# Allegro board vibration.brd
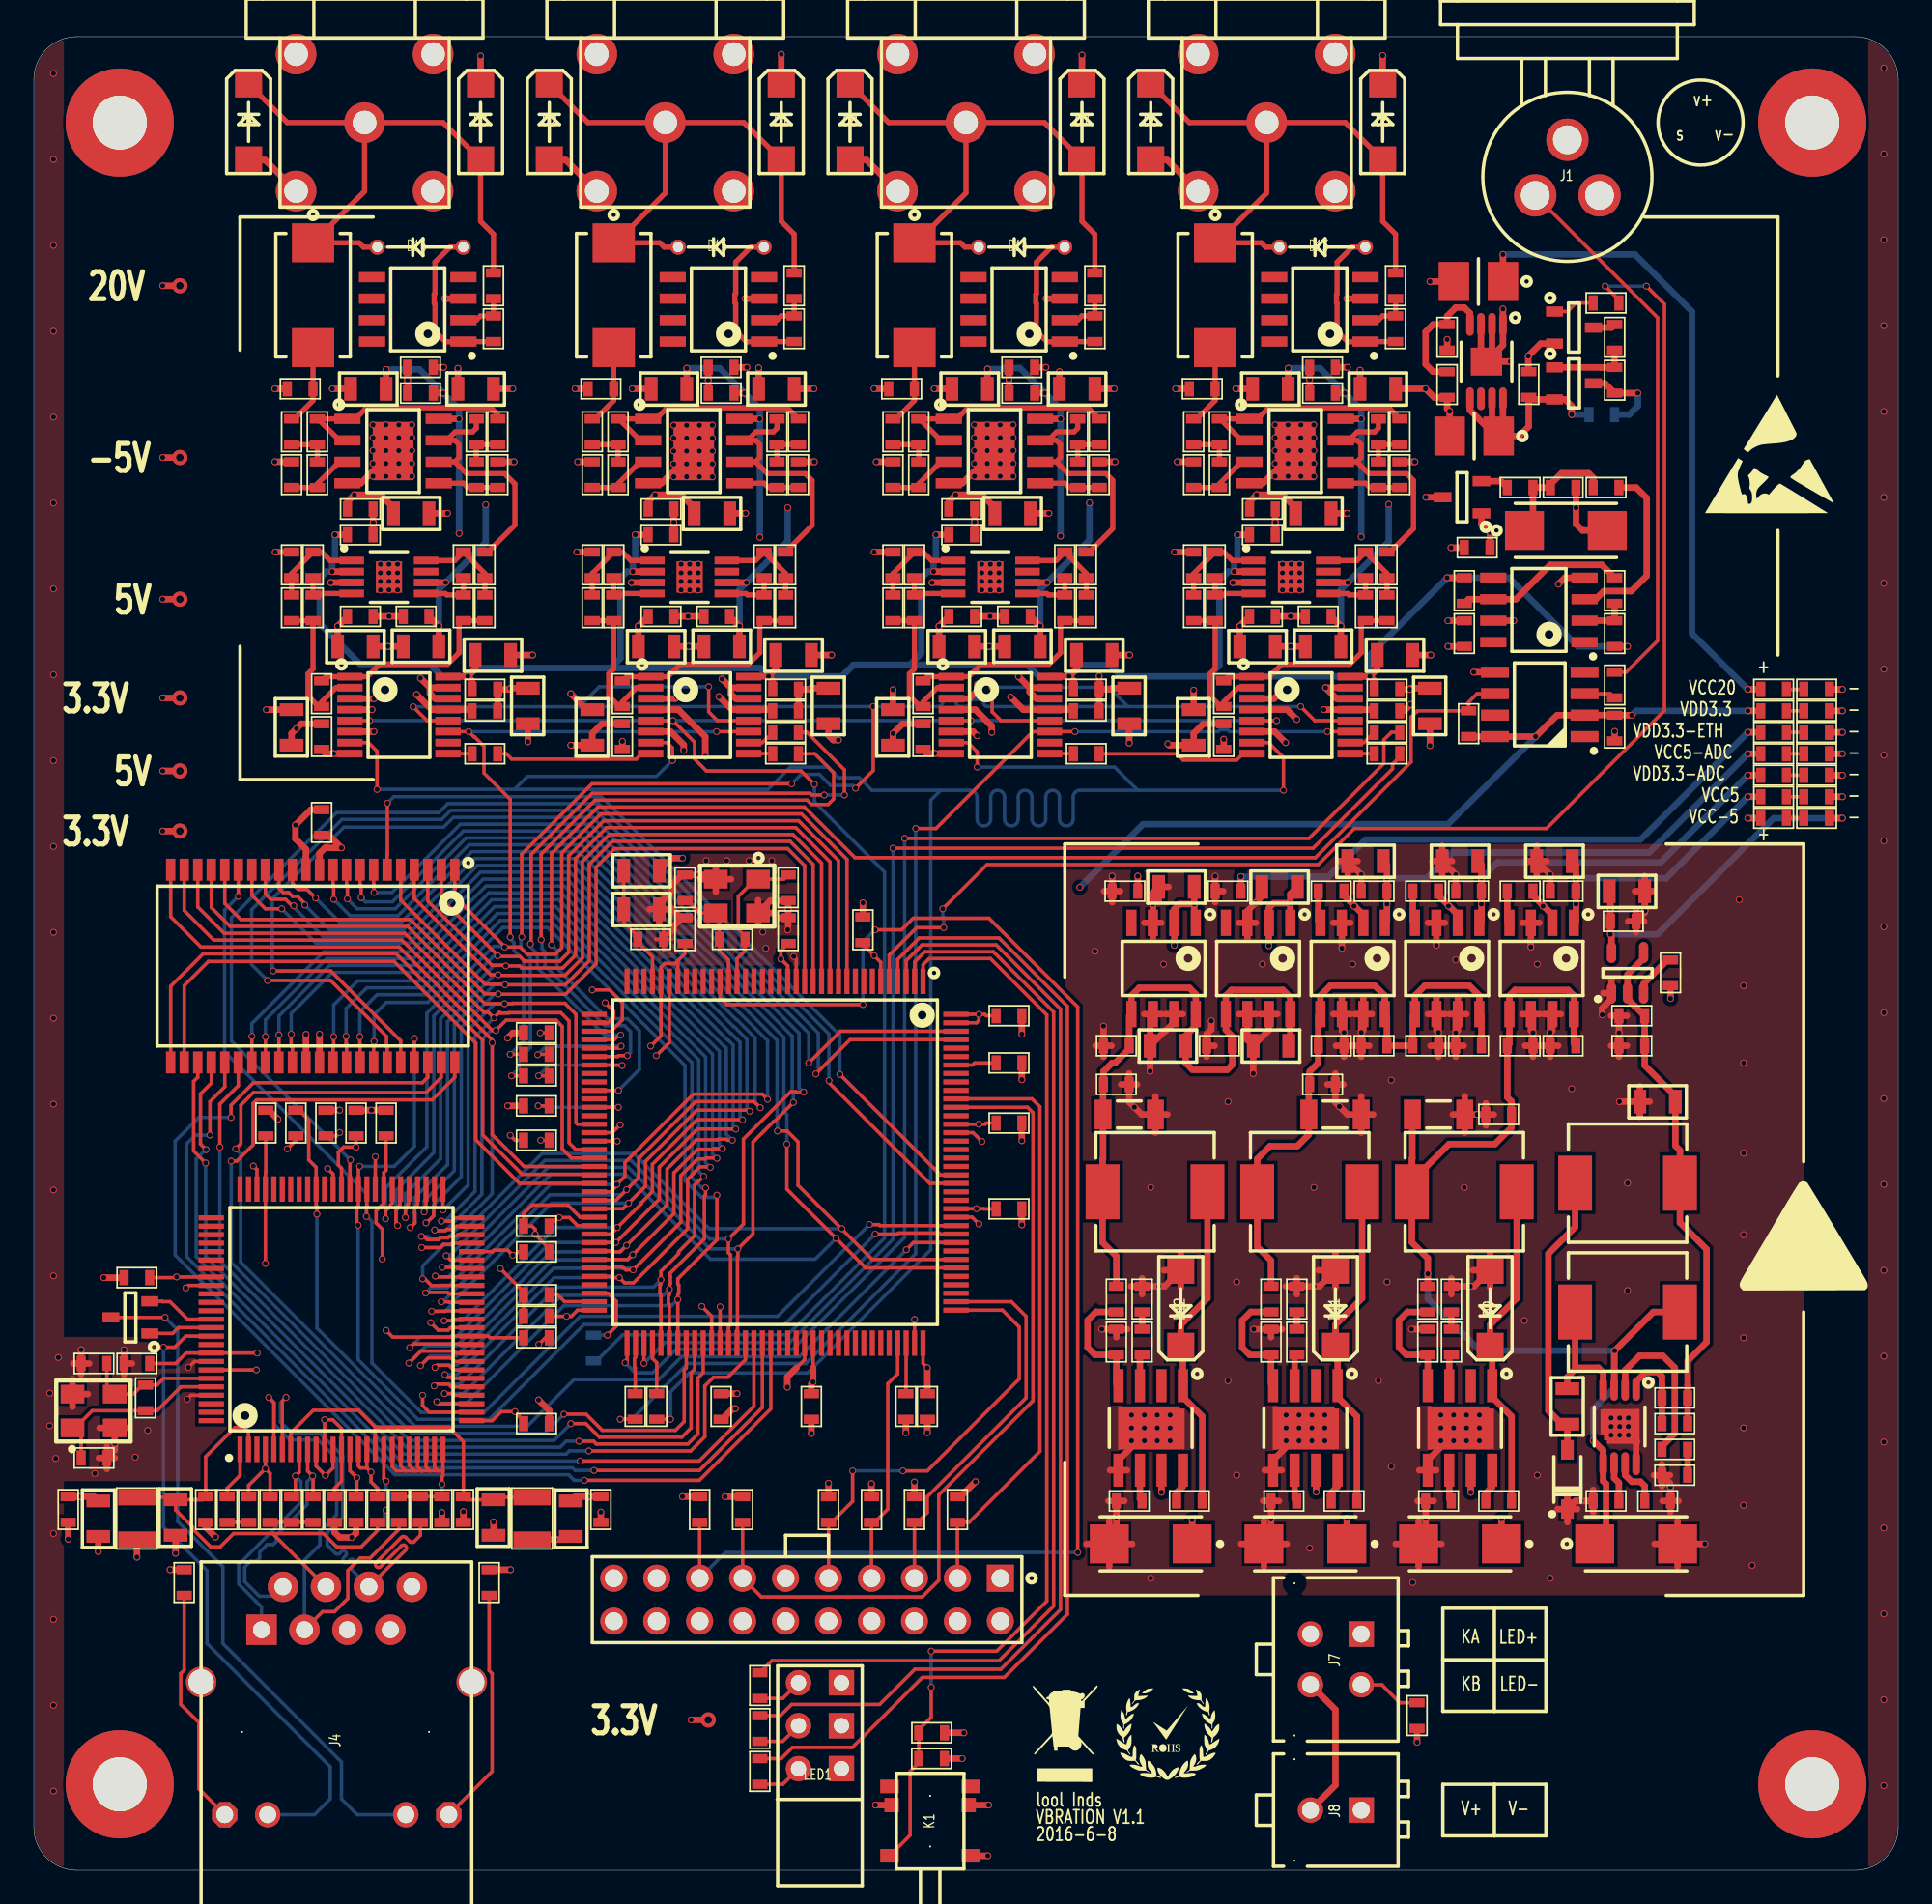
[diagram p0: board, top side]
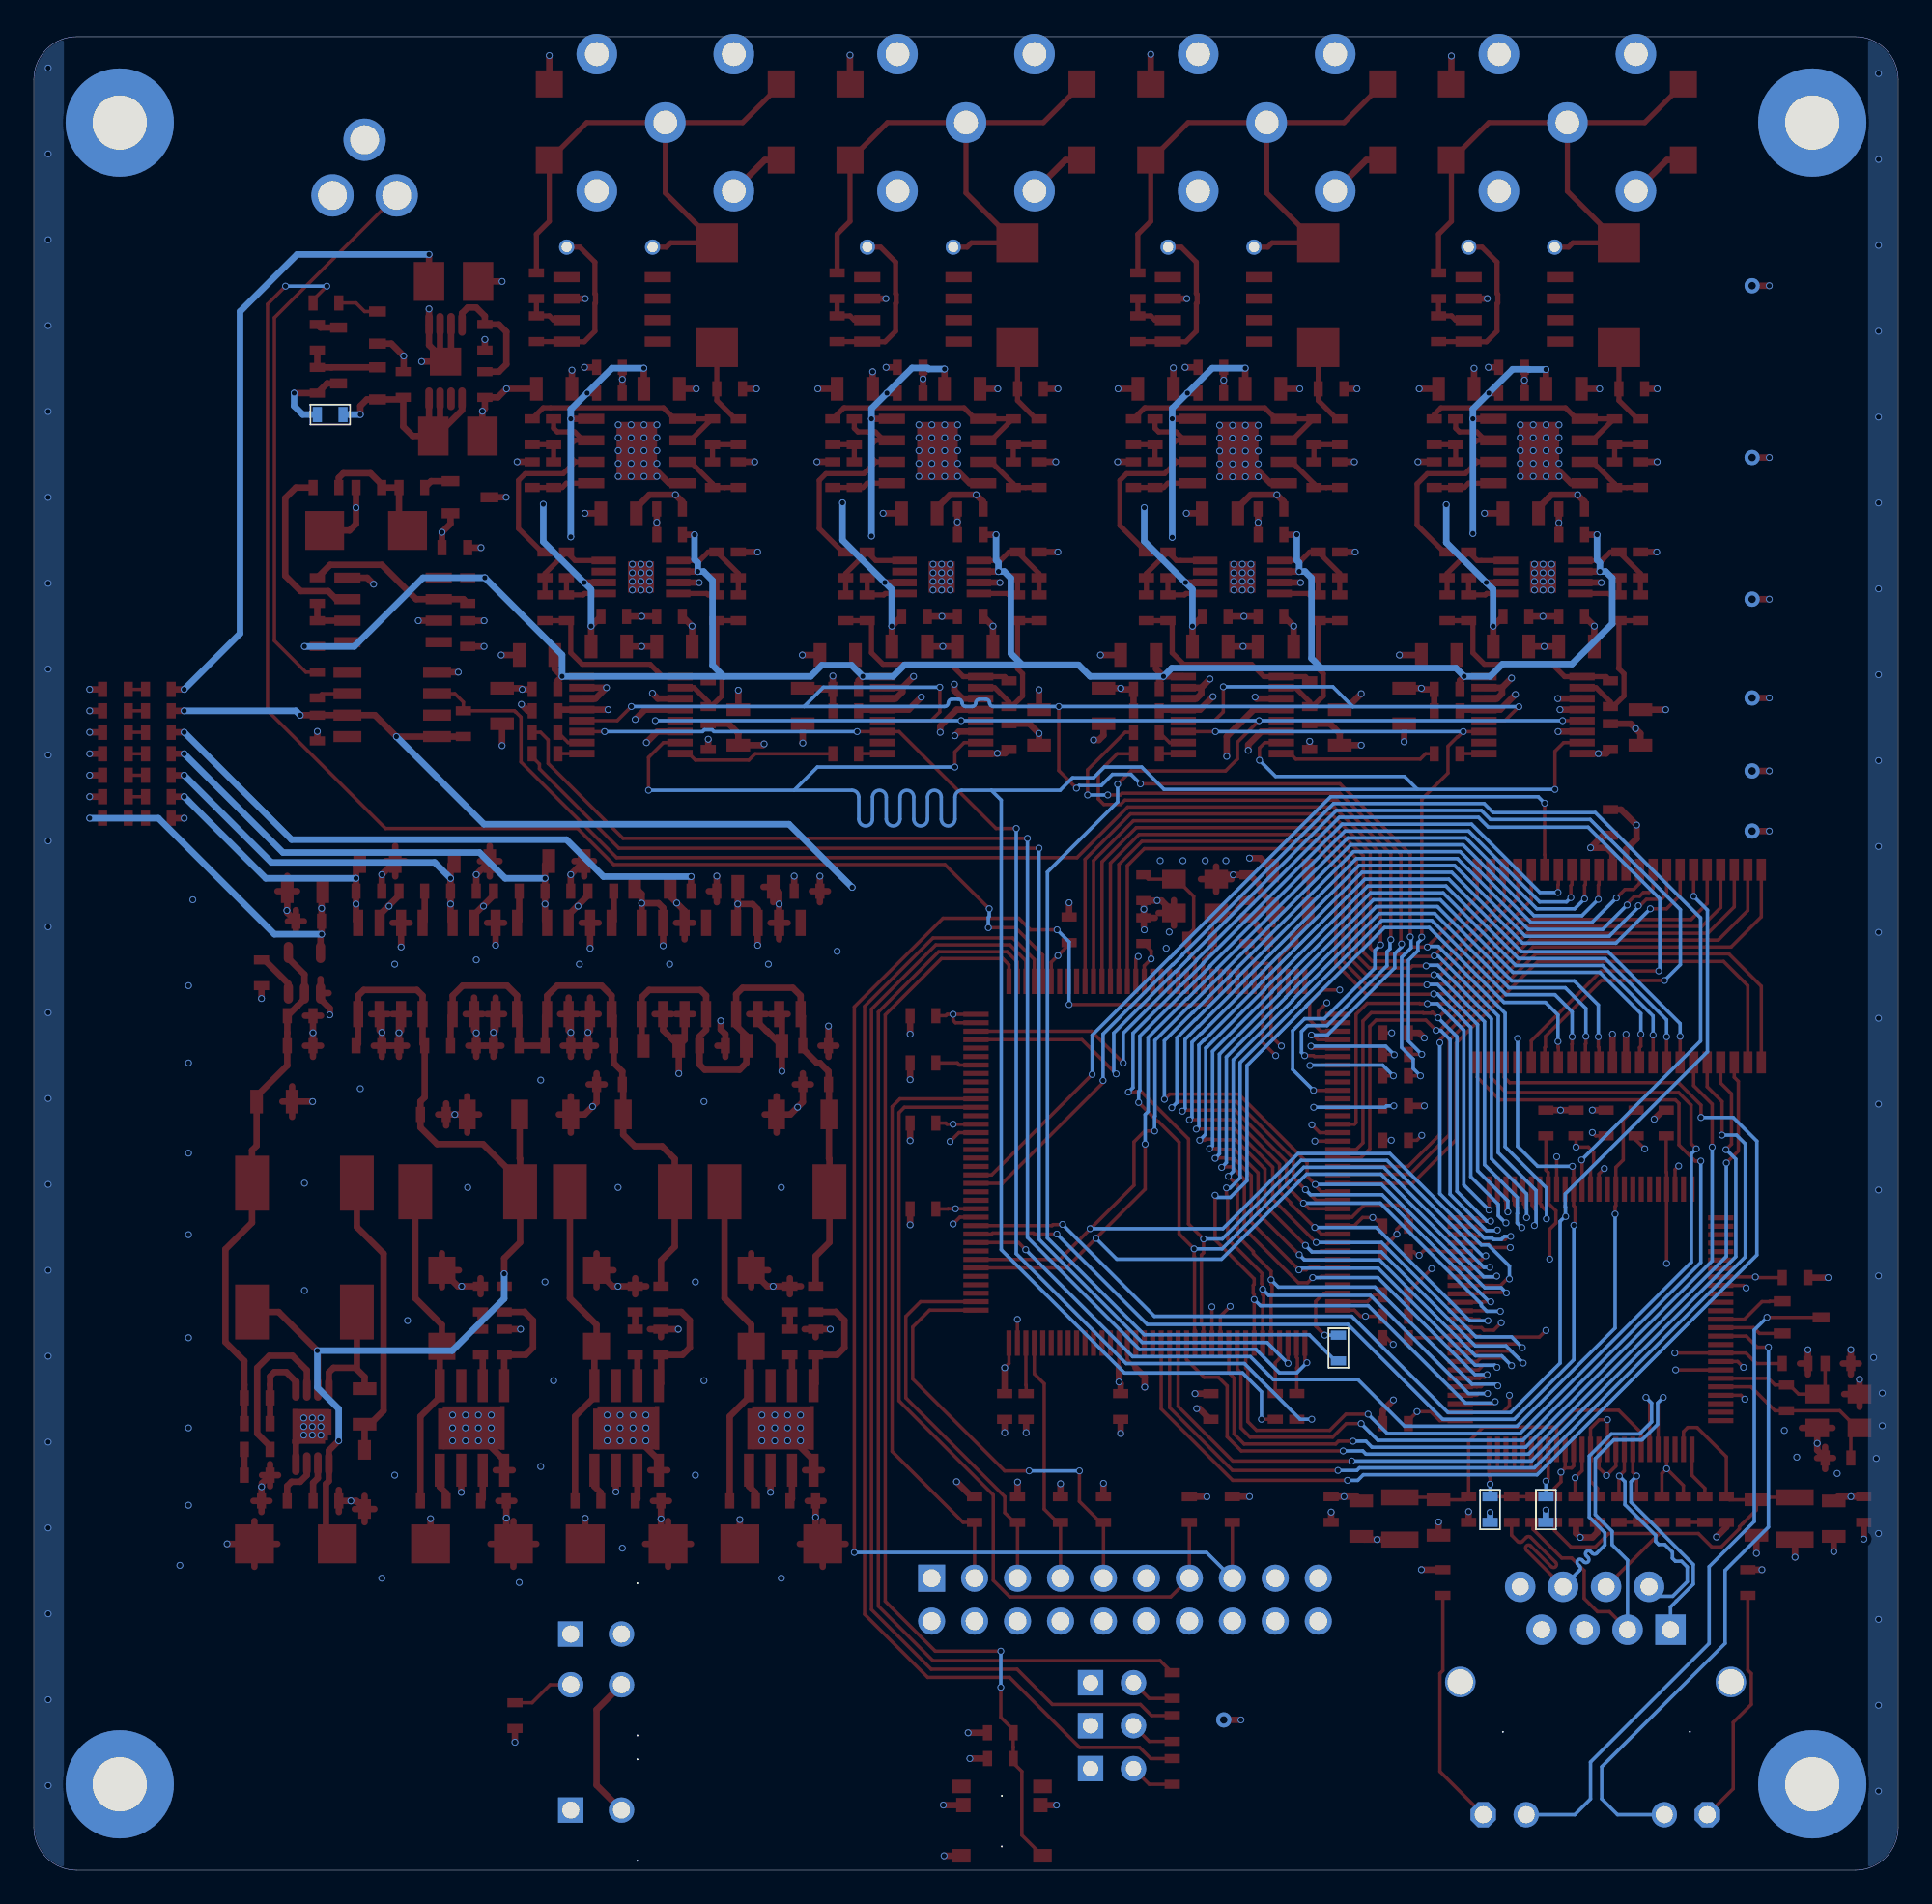
[diagram p1: board, bottom side, seen from below]

Outline 110.24 x 108.46 mm; copper layers: TOP, GND, POWER, BOTTOM. Coordinates in mm from the lower left corner of the outline.
Outline path: 0,105.92 arc(0.74,107.71) 2.54,108.46 107.7,108.46 arc(109.49,107.71) 110.24,105.92 110.24,2.54 arc(109.49,0.74) 107.7,0 2.54,0 arc(0.74,0.74) 0,2.54 0,105.92

## Design rules (mm)
net group CLK: nets CLK N175698
net group MODE: nets MODE N178917
net group N02366: nets N02371 N175911
net group N128197: nets N128197 N175907
net group N128201: nets N128201 N175989
net group N128205: nets N128205 N176012
net group N135939: nets N135939 N136019
net group N145831: nets N145831 N145835
net group N175561: nets N175561 N189451
net group N175603: nets N175603 N190705
net group N183155: nets N183155 N183159
net group N185294: nets N185294 N185298
net group N189201: nets N189201 N189205
net group N190188: nets N190188 N190192
net group N190693: nets N190693 N190697
net group N191748: nets N191748 N191928
net group N191869: nets N191869 N191883
net group N191873: nets N191873 N191890
net group N191932: nets N191932 N191963
net group N192408: nets N192408 N192428
net group N203113: nets N203113 N229021
net group N229005: nets N229005 N229185
net group OSC_IN: nets OSC_IN OSC_OUT
net group RXI: nets RXIN RXIP
net group SYNC: nets N175745 SYNC
net group TXO: nets TXON TXOP
net group VREF: nets N86153 N86184
net group X1: nets X1 X2
net group 5.6V: nets N11014 N183039 N183079 N183167 N185264 N185268 N185302
net group AOUTN_F1: nets AOUT_F1 AOUTN_F1 AOUTP_F1 N99831_F1 N99836_F1 N99973_F1 N100067_F1 N100071_F1 N101702_F1 N105142_F1 N105162_F1 N105338_F1 N105386_F1
net group AOUTN_F2: nets AOUT_F2 AOUTN_F2 AOUTP_F2 N99831_F2 N99836_F2 N99973_F2 N100067_F2 N100071_F2 N101702_F2 N105142_F2 N105162_F2 N105338_F2 N105386_F2
net group AOUTN_F5: nets AOUT_F5 AOUTN_F5 AOUTP_F5 N99831_F5 N99836_F5 N99973_F5 N100067_F5 N100071_F5 N101702_F5 N105142_F5 N105162_F5 N105338_F5 N105386_F5
net group AOUTN_F6: nets AOUT_F6 AOUTN_F6 AOUTP_F6 N99831_F6 N99836_F6 N99973_F6 N100067_F6 N100071_F6 N101702_F6 N105142_F6 N105162_F6 N105338_F6 N105386_F6
net group N02329: nets N02329
net group N02340: nets N02340
net group N02351: nets N02351
net group N84190: nets N84190 N86139 N86146
net group N190056: nets N190056 N190112 N190200
net group N192288: nets N192288 N192348 N192436

## Placement (name value [footprint] x y rotation side)
BEAD1  10R  [0805]  35.93 59.13 180 top
C1  0.1uF  [0603]  93.47 67.56 90 top
C2  10uF  [0805]  37.56 87.63 180 top
C3  0.1uF  [0603]  40.64 87.38 180 top
C4  220pF  [0603]  34.54 85.09 90 top
C5  10uF50V  [CAP-7343]  34.29 93.17 270 top
C6  120pF  [0603]  43.94 85.09 90 top
C7  200pF  [0603]  33.02 82.55 270 top
C8  47pF  [0603]  45.21 82.55 270 top
C9  10uF  [0805]  40.67 72.39 0 top
C10  0.1uF  [0603]  40.38 74.17 0 top
C11  1nF  [0603]  34.8 69.59 90 top
C12  0.1uF  [0603]  44.45 69.85 180 top
C13  10uF  [0805]  44.92 71.88 180 top
C14  5.6nF  [0603]  34.29 77.21 90 top
C15  5.6nF  [0603]  43.18 77.21 90 top
C16  0.1uF  [0603]  37.08 78.99 0 top
C17  10uF  [0805]  33.02 67.6 90 top
C18  0.1uF  [0603]  34.8 67.06 270 top
C19  0.1uF  [0603]  44.45 68.58 0 top
C20  10uF  [0805]  46.99 68.87 90 top
C21  10uF  [0805]  36.8 72.39 180 top
C22  0.1uF  [0603]  37.09 74.17 180 top
C23  0.1uF  [0603]  37.09 80.52 180 top
C24  10uF  [0805]  40.1 80.26 180 top
C25  10uF  [0805]  19.78 87.63 180 top
C26  5.6nF  [0603]  16.51 77.21 90 top
C27  220pF  [0603]  16.76 85.09 90 top
C28  120pF  [0603]  26.16 85.09 90 top
C29  0.1uF  [0603]  26.67 69.85 180 top
C30  1nF  [0603]  17.02 69.59 90 top
C31  10uF  [0805]  22.32 80.26 180 top
C32  0.1uF  [0603]  19.3 78.99 0 top
C33  0.1uF  [0603]  22.86 87.38 180 top
C34  10uF  [0805]  27.14 71.88 180 top
C35  10uF50V  [CAP-7343]  16.51 93.17 270 top
C36  0.1uF  [0603]  17.02 67.06 270 top
C37  0.1uF  [0603]  26.67 68.58 0 top
C38  200pF  [0603]  15.24 82.55 270 top
C39  0.1uF  [0603]  22.6 74.17 0 top
C40  10uF  [0805]  19.02 72.39 180 top
C41  47pF  [0603]  27.43 82.55 270 top
C42  10uF  [0805]  15.24 67.6 90 top
C43  5.6nF  [0603]  25.4 77.21 90 top
C44  0.1uF  [0603]  19.31 80.52 180 top
C45  0.1uF  [0603]  19.31 74.17 180 top
C46  10uF  [0805]  29.21 68.87 90 top
C47  10uF  [0805]  22.89 72.39 0 top
C48  22pF  [0603]  3.56 24.38 180 top
C49  22pF  [0603]  3.56 29.97 180 top
C50  0.1uF  [0603]  2.03 21.34 270 top
C51  10uF  [0805]  3.81 20.79 270 top
C52  10uF  [0805]  8.38 20.86 90 top
C53  0.1uF  [0603]  10.16 21.33 90 top
C54  0.1uF  [0603]  33.53 21.34 270 top
C55  10uF  [0805]  31.75 20.79 270 top
C56  10uF  [0805]  27.18 20.86 90 top
C57  0.1uF  [0603]  25.4 21.34 90 top
C58  0.1uF  [0603]  19.05 44.2 270 top
C59  0.1uF  [0603]  19.05 21.33 90 top
C60  0.1uF  [0603]  6.09 29.97 0 top
C61  0.1uF  [0603]  17.78 21.33 90 top
C63  0.1uF  [0603]  29.72 36.58 180 top
C64  0.1uF  [0603]  29.72 26.42 180 top
C65  0.1uF  [0603]  6.09 35.05 0 top
C66  0.1uF  [0603]  13.72 44.2 270 top
C67  0.1uF  [0603]  20.83 44.2 270 top
C68  0.1uF  [0603]  29.72 31.5 180 top
C69  0.1uF  [0603]  13.97 21.33 90 top
C70  0.1uF  [0603]  20.32 21.33 90 top
C71  0.1uF  [0603]  24.13 21.33 90 top
C72  10uF  [0805]  35.93 56.85 180 top
C73  0.1uF  [0603]  36.48 55.07 180 top
C74  0.1uF  [0603]  17.02 61.98 270 top
C75  0.1uF  [0603]  17.27 44.2 270 top
C76  22pF  [0603]  44.6 58.12 270 top
C77  22pF  [0603]  38.51 58.12 270 top
C78  2.2uF  [0603]  29.72 34.04 0 top
C79  2.2uF  [0603]  51.56 27.43 90 top
C80  0.1uF  [0603]  53.08 6.6 0 top
C81  0.1uF  [0603]  29.72 49.53 0 top
C82  0.1uF  [0603]  38.51 55.58 270 top
C83  0.1uF  [0603]  44.6 55.58 270 top
C84  0.1uF  [0603]  29.72 43.18 0 top
C85  0.1uF  [0603]  29.72 38.1 0 top
C86  0.1uF  [0603]  29.72 32.77 0 top
C87  0.1uF  [0603]  45.97 27.43 90 top
C88  0.1uF  [0603]  40.64 27.43 90 top
C89  0.1uF  [0603]  52.83 27.43 90 top
C90  0.1uF  [0603]  57.66 39.12 180 top
C91  0.1uF  [0603]  57.66 44.2 180 top
C92  0.1uF  [0603]  57.66 50.55 180 top
C93  0.1uF  [0603]  49.02 55.63 270 top
C94  10uF  [0805]  73.12 87.63 180 top
C95  5.6nF  [0603]  69.85 77.21 90 top
C96  220pF  [0603]  70.1 85.09 90 top
C97  120pF  [0603]  79.5 85.09 90 top
C98  0.1uF  [0603]  80.01 69.85 180 top
C99  1nF  [0603]  70.36 69.59 90 top
C100  10uF  [0805]  76.23 72.39 0 top
C101  0.1uF  [0603]  72.64 78.99 0 top
C102  0.1uF  [0603]  76.2 87.38 180 top
C103  10uF  [0805]  80.48 71.88 180 top
C104  10uF50V  [CAP-7343]  69.85 93.17 270 top
C105  0.1uF  [0603]  70.36 67.06 270 top
C106  0.1uF  [0603]  80.01 68.58 0 top
C107  200pF  [0603]  68.58 82.55 270 top
C108  0.1uF  [0603]  75.94 74.17 0 top
C109  10uF  [0805]  72.36 72.39 180 top
C110  47pF  [0603]  80.77 82.55 270 top
C111  10uF  [0805]  68.58 67.6 90 top
C112  5.6nF  [0603]  78.74 77.21 90 top
C113  0.1uF  [0603]  72.65 80.52 180 top
C114  0.1uF  [0603]  72.65 74.17 180 top
C115  10uF  [0805]  82.55 68.87 90 top
C116  10uF  [0805]  75.66 80.26 180 top
C117  10uF  [0805]  55.34 87.63 180 top
C118  5.6nF  [0603]  52.07 77.21 90 top
C119  220pF  [0603]  52.32 85.09 90 top
C120  120pF  [0603]  61.72 85.09 90 top
C121  0.1uF  [0603]  62.23 69.85 180 top
C122  1nF  [0603]  52.58 69.59 90 top
C123  10uF  [0805]  58.45 72.39 0 top
C124  0.1uF  [0603]  54.86 78.99 0 top
C125  0.1uF  [0603]  58.42 87.38 180 top
C126  10uF  [0805]  62.7 71.88 180 top
C127  10uF50V  [CAP-7343]  52.07 93.17 270 top
C128  0.1uF  [0603]  52.58 67.06 270 top
C129  0.1uF  [0603]  62.23 68.58 0 top
C130  200pF  [0603]  50.8 82.55 270 top
C131  0.1uF  [0603]  58.16 74.17 0 top
C132  10uF  [0805]  54.58 72.39 180 top
C133  47pF  [0603]  62.99 82.55 270 top
C134  10uF  [0805]  50.8 67.6 90 top
C135  5.6nF  [0603]  60.96 77.21 90 top
C136  0.1uF  [0603]  54.87 80.52 180 top
C137  0.1uF  [0603]  54.87 74.17 180 top
C138  10uF  [0805]  64.77 68.87 90 top
C139  10uF  [0805]  57.88 80.26 180 top
C140  1uF  [0603]  90.42 48.77 0 top
C141  0.01uF  [0603]  87.88 57.91 180 top
C142  0.1uF  [0603]  90.42 57.91 180 top
C143  10uF  [0805]  89.92 59.69 180 top
C144  150PF  [0603]  83.82 31.24 270 top
C145  0.1uF  [0603]  87.89 48.77 180 top
C146  10uF35V  [CAP-6032]  84.33 19.3 180 top
C147  0.1uF  [0603]  86.62 21.84 180 top
C148  0.1uF  [0603]  86.61 44.7 180 top
C149  22uF  [1206]  83.06 44.7 180 top
C150  0.01uF  [0603]  96.77 53.08 90 top
C151  2.2uF35V  [CAP-3528]  85.42 93.98 180 top
C152  1uF35V  [CAP-3528]  85.16 84.84 180 top
C153  0.1uF  [0603]  93.98 56.13 180 top
C154  1uF  [0603]  94.49 48.77 180 top
C155  0.1uF  [0603]  94.49 50.55 180 top
C156  10uF  [0805]  94.2 57.91 180 top
C157  1uF  [0805]  90.68 27.43 90 top
C158  10uF  [0805]  96.01 45.47 180 top
C159  2.2nF  [0603]  97.03 23.37 0 top
C160  0.1uF  [0603]  96.01 21.84 180 top
C161  10uF35V  [CAP-6032]  94.74 19.3 0 top
C162  100pF  [0603]  97.03 27.94 180 top
C163  1uF  [0805]  79.47 87.63 180 top
C164  0.1uF  [0603]  76.2 88.9 0 top
C165  0.47uF  [0603]  85.34 78.23 0 top
C166  1uF  [0805]  61.69 87.63 180 top
C167  0.1uF  [0603]  58.42 88.9 0 top
C168  150PF  [0603]  74.68 31.24 270 top
C169  1uF  [0603]  79.25 48.77 0 top
C170  0.1uF  [0603]  76.71 48.77 180 top
C171  0.01uF  [0603]  76.71 57.91 180 top
C172  0.1uF  [0603]  79.25 57.91 180 top
C173  10uF  [0805]  78.74 59.69 180 top
C174  10uF35V  [CAP-6032]  75.18 19.3 180 top
C175  0.1uF  [0603]  77.47 21.84 180 top
C176  0.1uF  [0603]  76.2 46.48 0 top
C177  22uF  [1206]  76.94 44.7 180 top
C178  0.1uF  [0603]  90.43 81.79 180 top
C179  100uF10V  [CAP-6032]  90.59 79.25 0 top
C180  1uF  [0603]  84.83 48.77 0 top
C181  0.1uF  [0603]  82.3 48.77 180 top
C182  0.01uF  [0603]  82.3 57.91 180 top
C183  0.1uF  [0603]  84.84 57.91 180 top
C184  10uF  [0805]  84.33 59.69 180 top
C185  10nF  [0603]  93.47 75.69 270 top
C186  1uF  [0805]  43.91 87.63 180 top
C187  0.1uF  [0603]  40.64 88.9 0 top
C188  0.1uF  [0603]  84.58 73.15 90 top
C189  10uF  [0805]  67.06 48.77 180 top
C190  0.1uF  [0603]  64.01 48.77 180 top
C191  0.1uF  [0603]  64.52 57.91 180 top
C192  10uF  [0805]  67.56 58.17 180 top
C193  1uF  [0805]  26.13 87.63 180 top
C194  0.1uF  [0603]  22.86 88.9 0 top
C195  150PF  [0603]  65.53 31.24 270 top
C196  10uF35V  [CAP-6032]  66.04 19.3 180 top
C197  0.1uF  [0603]  68.33 21.84 180 top
C198  0.1uF  [0603]  64.01 46.48 0 top
C199  22uF  [1206]  64.77 44.7 180 top
C200  10uF  [0805]  73.15 48.77 180 top
C201  0.1uF  [0603]  70.61 57.91 180 top
C202  10uF  [0805]  73.66 58.17 180 top
C203  0.1uF  [0603]  70.1 48.77 180 top
C204  0.1uF  [0603]  88.39 87.89 270 top
C205  0.1uF  [0603]  83.57 90.68 90 top
D1  B340A-13-F  [SMA]  44.2 105.66 270 top
D2  B340A-13-F  [SMA]  30.48 105.66 270 top
D3  B340A-13-F  [SMA]  26.42 105.66 270 top
D4  B340A-13-F  [SMA]  12.7 105.66 270 top
D5  B340A-13-F  [SMA]  79.76 105.66 270 top
D6  B340A-13-F  [SMA]  66.04 105.66 270 top
D7  B340A-13-F  [SMA]  61.98 105.66 270 top
D8  B340A-13-F  [SMA]  48.26 105.66 270 top
D9  B340A-13-F  [SMA]  86.11 30.99 90 top
D10  CMMSH1-40  [SOD123]  90.68 23.11 90 top
D11  B340A-13-F  [SMA]  76.96 30.99 90 top
D12  B340A-13-F  [SMA]  67.82 30.99 90 top
D13  1N457  [1N457-DIP]  73.65 96.01 0 top
D14  1N457  [1N457-DIP]  55.87 96.01 0 top
D15  1N457  [1N457-DIP]  38.09 96.01 0 top
D16  1N457  [1N457-DIP]  20.31 96.01 0 top
D17  LED  [0603]  102.87 63.5 180 top
D18  LED  [0603]  102.87 62.23 180 top
D19  LED  [0603]  102.87 66.04 180 top
D20  LED  [0603]  102.87 64.77 180 top
D21  LED  [0603]  102.87 68.58 180 top
D22  LED  [0603]  102.87 67.31 180 top
D23  LED  [0603]  102.87 69.85 180 top
J1  -  [GX12-3P]  90.68 100.17 0 top
J2  -  [BNC]  37.34 103.38 0 top
J3  -  [BNC]  19.56 103.38 0 top
J4  -  [RJ45]  13.46 14.22 270 top
J5  -  [BNC]  72.9 103.38 0 top
J6  -  [BNC]  55.12 103.38 0 top
J7  4 HEADER  [MOLEX-2-2]  78.49 13.97 90 top
J8  HEADER 2  [MOLEX-2]  78.49 3.56 90 top
K1  -  [KEY-HD11]  50.6 4.95 270 top
L1  1uH  [1008]  6.1 20.81 90 top
L2  1uH  [1008]  29.46 20.81 90 top
L3  15uH  [L-7-7-3]  84.58 40.13 180 top
L4  4.7uH  [L-7-7-3]  94.23 40.64 0 top
L5  4.7uH  [L-7-7-3]  94.23 33.02 0 top
L6  15uH  [L-7-7-3]  75.44 40.13 180 top
L7  15uH  [L-7-7-3]  66.29 40.13 180 top
LED1  -  [LED-3]  47.75 11.09 180 top
M1  -  [MTG]  105.16 5.08 0 top
M2  -  [MTG]  5.08 103.38 0 top
M3  -  [MTG]  105.16 103.38 0 top
M4  -  [MTG]  5.08 5.08 0 top
NOREF  -  []  46.48 6.56 0 top
NOREF#2  -  []  105.16 5.08 90 top
NOREF#3  -  []  104.98 0 90 top
NOREF#4  -  []  5.08 5.08 0 top
NOREF#5  -  []  53.01 2.91 0 top
NOREF#6  -  []  19.56 103.38 0 top
NOREF#7  -  []  0 6.86 0 top
NOREF#8  -  []  63.5 4.06 0 top
NOREF#9  -  []  0 6.65 0 top
NOREF#10  -  []  17.89 7.73 0 top
NOREF#11  -  []  58.67 3.81 0 top
NOREF#12  -  []  65 7.11 0 top
NOREF#13  -  []  72.9 103.38 0 top
NOREF#14  -  []  100.84 34.29 0 top
NOREF#15  -  []  98.81 80.26 0 top
O1  25M  [OSC-3225]  3.54 27.16 90 top
O2  8M  [OSC-3225]  41.57 57.62 270 top
P2  JTAG  [H-10-2]  57.15 17.27 180 top
Q1  AO3407  [AO3407-SOT23]  91.07 87.95 0 top
Q2  S9014  [S9014-SOT23]  91.07 91.25 0 top
R1  75  [0603]  26.67 66.04 180 top
R2  75  [0603]  62.23 66.04 180 top
R5  75  [0603]  44.45 67.31 180 top
R6  75  [0603]  80.01 67.31 180 top
R7  75  [0603]  44.45 66.04 180 top
R8  75  [0603]  80.01 66.04 180 top
R9  360  [0603]  84.84 67.82 270 top
R10  240  [0603]  93.47 70.11 270 top
R11  2.7K  [0603]  33.02 85.09 90 top
R12  2.7K  [0603]  34.54 82.55 90 top
R13  6.8K  [0603]  43.94 82.55 270 top
R14  6.8K  [0603]  45.21 85.09 270 top
R15  200K  [0603]  33.53 87.63 180 top
R16  510  [0603]  33.02 77.21 90 top
R17  510  [0603]  44.45 77.21 90 top
R18  240  [0603]  33.02 74.67 90 top
R19  240  [0603]  44.45 74.67 90 top
R21  51  [0603]  34.29 74.67 90 top
R22  51  [0603]  43.18 74.67 90 top
R23  510  [0603]  15.24 77.21 90 top
R24  200K  [0603]  15.75 87.63 180 top
R25  2.7K  [0603]  15.24 85.09 90 top
R26  6.8K  [0603]  27.43 85.09 270 top
R27  51  [0603]  25.4 74.67 90 top
R29  240  [0603]  15.24 74.67 90 top
R30  51  [0603]  16.51 74.67 90 top
R31  240  [0603]  26.67 74.67 90 top
R32  510  [0603]  26.67 77.21 90 top
R33  2.7K  [0603]  16.76 82.55 90 top
R34  6.8K  [0603]  26.16 82.55 270 top
R35  1M  [0603]  6.6 27.94 90 top
R36  300  [0603]  12.7 21.33 90 top
R37  12K  [0603]  11.43 21.33 90 top
R38  75  [0603]  16.51 21.33 90 top
R39  75  [0603]  15.24 21.33 90 top
R40  0  [0603]  20.83 21.33 90 bottom
R41  NC  [0603]  24.13 21.33 90 bottom
R42  75  [0603]  22.86 21.33 90 top
R43  75  [0603]  21.59 21.33 90 top
R44  200  [0603]  8.89 17.02 90 top
R45  200  [0603]  26.92 17.02 90 top
R46  36  [0603]  29.72 48.26 0 top
R47  18  [0603]  29.72 46.99 0 top
R48  0  [0603]  33.1 30.89 270 bottom
R49  36  [0603]  35.56 27.43 270 top
R50  18  [0603]  36.83 27.43 270 top
R51  1M  [0603]  41.3 55.07 0 top
R52  10K  [0603]  53.09 8.13 180 top
R53  10K  [0603]  41.91 21.33 90 top
R54  10K  [0603]  46.99 21.33 90 top
R55  10K  [0603]  49.53 21.33 90 top
R56  10K  [0603]  52.07 21.33 90 top
R57  10K  [0603]  54.61 21.33 90 top
R58  10K  [0603]  57.66 47.75 180 top
R59  10K  [0603]  39.37 21.34 270 top
R60  10K  [0603]  29.72 45.21 0 top
R61  510  [0603]  68.58 77.21 90 top
R62  200K  [0603]  69.09 87.63 180 top
R63  2.7K  [0603]  68.58 85.09 90 top
R64  6.8K  [0603]  80.77 85.09 270 top
R65  51  [0603]  78.74 74.67 90 top
R67  240  [0603]  68.58 74.67 90 top
R68  51  [0603]  69.85 74.67 90 top
R69  240  [0603]  80.01 74.67 90 top
R70  510  [0603]  80.01 77.21 90 top
R71  2.7K  [0603]  70.1 82.55 90 top
R72  6.8K  [0603]  79.5 82.55 270 top
R73  510  [0603]  50.8 77.21 90 top
R74  200K  [0603]  51.31 87.63 180 top
R75  2.7K  [0603]  50.8 85.09 90 top
R76  6.8K  [0603]  62.99 85.09 270 top
R77  51  [0603]  60.96 74.67 90 top
R79  240  [0603]  50.8 74.67 90 top
R80  51  [0603]  52.07 74.67 90 top
R81  240  [0603]  62.23 74.67 90 top
R82  510  [0603]  62.23 77.21 90 top
R83  2.7K  [0603]  52.32 82.55 90 top
R84  6.8K  [0603]  61.72 82.55 270 top
R85  20K  [0603]  82.42 31.24 90 top
R86  120K  [0603]  82.42 33.78 270 top
R87  100K  [0603]  83.06 21.84 180 top
R88  100K  [0603]  83.82 33.78 270 top
R89  4.7K  [0603]  81.79 9.15 270 top
R90  2M  [0603]  83.57 87.88 90 top
R91  1K  [0603]  42.93 10.92 90 top
R92  1K  [0603]  42.93 8.38 90 top
R93  1K  [0603]  42.93 5.84 90 top
R94  36K  [0603]  92.96 21.84 0 top
R95  68K  [0603]  97.03 26.42 180 top
R96  10K  [0603]  97.03 24.89 180 top
R97  33  [0603]  80.52 91.18 90 top
R98  16  [0603]  62.74 91.18 90 top
R99  20K  [0603]  73.15 31.24 90 top
R100  120K  [0603]  73.15 33.78 270 top
R101  100K  [0603]  73.91 21.84 180 top
R102  100K  [0603]  74.68 33.78 270 top
R103  100  [0603]  92.96 81.79 0 top
R104  1K  [0603]  87.88 81.79 0 top
R105  1K  [0603]  93.47 73.15 90 top
R106  16  [0603]  44.96 91.18 90 top
R107  100  [0603]  84.58 75.69 270 top
R108  16  [0603]  27.18 91.18 90 top
R109  20K  [0603]  64.01 31.24 90 top
R110  120K  [0603]  64.01 33.78 270 top
R111  100K  [0603]  64.77 21.84 180 top
R112  100K  [0603]  65.53 33.78 270 top
R113  4.7K  [0603]  93.47 88.14 90 top
R114  NC  [0603]  92.71 86.11 180 bottom
R115  6.8K  [0603]  93.47 90.68 90 top
R116  33K  [0603]  92.96 92.71 0 top
R117  330  [0603]  80.52 93.73 270 top
R118  330  [0603]  62.74 93.73 270 top
R119  330  [0603]  44.96 93.73 270 top
R120  330  [0603]  27.18 93.73 270 top
R121  10K  [0603]  15.49 44.2 270 top
R122  2K  [0603]  105.41 63.5 180 top
R123  2K  [0603]  105.41 62.23 180 top
R124  10K  [0603]  105.41 69.85 180 top
R125  2K  [0603]  105.41 66.04 180 top
R126  1K  [0603]  105.41 64.77 180 top
R127  1K  [0603]  105.41 68.58 180 top
R128  1K  [0603]  105.41 67.31 180 top
U1  FOD060L  [FOD060L-SOIC8]  89.04 68.96 180 top
U2  ADA4898-2  [ADA4898-2-SOIC8]  39.02 83.95 0 top
U3  ADS1271  [ADS1271-SOP16]  39.37 68.33 0 top
U4  THS4131IDGN  [THS4131IDGN-SOP8]  38.78 76.49 0 top
U5  ADS1271  [ADS1271-SOP16]  21.59 68.33 0 top
U6  ADA4898-2  [ADA4898-2-SOIC8]  21.24 83.95 0 top
U7  THS4131IDGN  [THS4131IDGN-SOP8]  21 76.49 0 top
U8  BAW56  [BAW56-SOT23]  5.71 32.7 180 top
U9  W5300  [W5300-QFP100]  18.19 32.59 90 top
U10  STM32F407ZGT6  [STM32F407ZGT6-LQFP144]  43.83 41.88 270 top
U11  IS61WV51216BLL  [IS61WV51216BLL-TSOP44]  16.49 53.48 270 top
U12  ADS1271  [ADS1271-SOP16]  74.93 68.33 0 top
U13  ADA4898-2  [ADA4898-2-SOIC8]  74.58 83.95 0 top
U14  THS4131IDGN  [THS4131IDGN-SOP8]  74.34 76.49 0 top
U15  ADS1271  [ADS1271-SOP16]  57.15 68.33 0 top
U16  ADA4898-2  [ADA4898-2-SOIC8]  56.8 83.95 0 top
U17  THS4131IDGN  [THS4131IDGN-SOP8]  56.56 76.49 0 top
U18  MP1584  [MP1584-SOIC8]  84.33 26.16 270 top
U19  LT3080  [LT3080-SOP8]  85.89 89.24 270 top
U20  LT1763-5  [LT1763-SOP8]  89.15 53.34 270 top
U21  LT1964-5  [LT1964-5-SOT23]  94.23 53.09 90 top
U22  LT3580  [LT3580-SOP8]  93.77 26.25 270 top
U23  LM334SM  [LM334SM-SOP8]  76.04 92.33 180 top
U24  REF3125  [REF3125-SOT23]  84.45 81.21 180 top
U25  LM334SM  [LM334SM-SOP8]  58.26 92.33 180 top
U26  MP1584  [MP1584-SOIC8]  75.18 26.16 270 top
U27  LT1763-5  [LT1763-SOP8]  77.98 53.34 270 top
U28  LT1763-3.3  [LT1763-SOP8]  83.57 53.34 270 top
U29  LM334SM  [LM334SM-SOP8]  40.48 92.33 180 top
U30  OPA350UA  [OPA350UA-SOP8]  88.99 74.55 180 top
U31  LM334SM  [LM334SM-SOP8]  22.7 92.33 180 top
U32  LT1963-3.3  [LT1963-SOP8]  66.8 53.34 270 top
U33  MP1584  [MP1584-SOIC8]  66.04 26.16 270 top
U34  LT1963-3.3  [LT1963-SOP8]  72.39 53.34 270 top

## Library data of the parts
BEAD1 = Res: signal model: DEFAULT_RESISTOR_10.000000OHM_2_1
C1 C3 C10 C12 C16 C18 C19 C22 C23 C29 C32 C33 C36 C37 C39 C44 C45 C50 C53 C54 C57-C61 C63-C71 C73-C75 C80-C93 C98 C101 C102 C105 C106 C108 C113 C114 C121 C124 C125 C128 C129 C131 C136 C137 C142 C145 C147 C148 C153 C155 C160 C164 C167 C170 C172 C175 C176 C178 C181 C183 C187 C188 C190 C191 C194 C197 C198 C201 C203-C205 = Cap: signal model: DEFAULT_CAPACITOR_100000pF_2_1
C2 C9 C13 C17 C20 C21 C24 C25 C31 C34 C40 C42 C46 C47 C51 C52 C55 C56 C72 C94 C100 C103 C109 C111 C115-C117 C123 C126 C132 C134 C138 C139 C143 C156 C158 C173 C184 C189 C192 C200 C202 = Cap: signal model: DEFAULT_CAPACITOR_1e+07pF_2_1
C4 C27 C96 C119 = Cap: signal model: DEFAULT_CAPACITOR_220.000000pF_2_1
C5 C35 C104 C127 C146 C151 C152 C161 C174 C179 C196 = Cap+
C6 C28 C97 C120 = Cap: signal model: DEFAULT_CAPACITOR_120.000000pF_2_1
C7 C38 C107 C130 = Cap: signal model: DEFAULT_CAPACITOR_200.000000pF_2_1
C8 C41 C110 C133 = Cap: signal model: DEFAULT_CAPACITOR_47.000000pF_2_1
C11 C30 C99 C122 = Cap: signal model: DEFAULT_CAPACITOR_1000pF_2_1
C14 C15 C26 C43 C95 C112 C118 C135 = Cap: signal model: DEFAULT_CAPACITOR_5600pF_2_1
C48 C49 C76 C77 = Cap: signal model: DEFAULT_CAPACITOR_22.000000pF_2_1
C78 C79 = Cap: signal model: DEFAULT_CAPACITOR_2.2e+06pF_2_1
C140 C154 C157 C163 C166 C169 C180 C186 C193 = Cap: signal model: DEFAULT_CAPACITOR_1e+06pF_2_1
C141 C150 C171 C182 C185 = Cap: signal model: DEFAULT_CAPACITOR_10000pF_2_1
C144 C168 C195 = Cap: signal model: DEFAULT_CAPACITOR_150.000000pF_2_1
C149 C177 C199 = Cap: signal model: DEFAULT_CAPACITOR_2.2e+07pF_2_1
C159 = Cap: signal model: DEFAULT_CAPACITOR_2200pF_2_1
C162 = Cap: signal model: DEFAULT_CAPACITOR_100.000000pF_2_1
C165 = Cap: signal model: DEFAULT_CAPACITOR_470000pF_2_1
D1-D12 = 1n5819
D13-D16 = 1n5819: signal model: DEFAULT_CAPACITOR_1457pF_2_1
D17-D23 = LED
J1 = GX12-3P
J2 J3 J5 J6 = BNC
J4 = RJ45
J7 = 4 HEADER
J8 = HEADER 2
K1 = KEY-HD11
L1 L2 = Inductor: signal model: DEFAULT_INDUCTOR_1000nH_2_1
L3 L6 L7 = Inductor: signal model: DEFAULT_INDUCTOR_15000nH_2_1
L4 L5 = Inductor: signal model: DEFAULT_INDUCTOR_4700nH_2_1
LED1 = LED-3
M1-M4 = MTG
O1 O2 = OSC-N
P2 = JTAG
Q1 = AO3407
Q2 = S9014
R1 R2 R5-R8 R21 R22 R27 R30 R38 R39 R42 R43 R65 R68 R77 R80 = Res: signal model: DEFAULT_RESISTOR_51.000000OHM_2_1
R9 = Res: signal model: DEFAULT_RESISTOR_360.000000OHM_2_1
R10 R18 R19 R29 R31 R67 R69 R79 R81 = Res: signal model: DEFAULT_RESISTOR_240.000000OHM_2_1
R11 R12 R25 R33 R63 R71 R75 R83 = Res: signal model: DEFAULT_RESISTOR_2700OHM_2_1
R13 R14 R26 R34 R64 R72 R76 R84 R115 = Res: signal model: DEFAULT_RESISTOR_6800OHM_2_1
R15 R24 R62 R74 = Res: signal model: DEFAULT_RESISTOR_200000OHM_2_1
R16 R17 R23 R32 R61 R70 R73 R82 = Res: signal model: DEFAULT_RESISTOR_510.000000OHM_2_1
R35 R40 R48 R51 = Res: signal model: DEFAULT_RESISTOR_0.001OHM_2_1
R36 = Res: signal model: DEFAULT_RESISTOR_300.000000OHM_2_1
R37 = Res: signal model: DEFAULT_RESISTOR_12000OHM_2_1
R41 R114 R122-R128 = Res
R44 R45 = Res: signal model: DEFAULT_RESISTOR_200.000000OHM_2_1
R46 R49 = Res: signal model: DEFAULT_RESISTOR_24.000000OHM_2_1
R47 R50 = Res: signal model: DEFAULT_RESISTOR_12.000000OHM_2_1
R52-R60 R96 R121 = Res: signal model: DEFAULT_RESISTOR_10000OHM_2_1
R85 R99 R109 = Res: signal model: DEFAULT_RESISTOR_20000OHM_2_1
R86 R100 R110 = Res: signal model: DEFAULT_RESISTOR_120000OHM_2_1
R87 R88 R101 R102 R111 R112 = Res: signal model: DEFAULT_RESISTOR_100000OHM_2_1
R89 R113 = Res: signal model: DEFAULT_RESISTOR_4700OHM_2_1
R90 = Res: signal model: DEFAULT_RESISTOR_0.002OHM_2_1
R91-R93 = Res: signal model: DEFAULT_RESISTOR_500.000000OHM_2_1
R94 = Res: signal model: DEFAULT_RESISTOR_36000OHM_2_1
R95 = Res: signal model: DEFAULT_RESISTOR_68000OHM_2_1
R97 = Res: signal model: DEFAULT_RESISTOR_33.000000OHM_2_1
R98 R106 R108 = Res: signal model: DEFAULT_RESISTOR_16.000000OHM_2_1
R103 R107 = Res: signal model: DEFAULT_RESISTOR_100.000000OHM_2_1
R104 R105 = Res: signal model: DEFAULT_RESISTOR_1000.000000OHM_2_1
R116 = Res: signal model: DEFAULT_RESISTOR_33000OHM_2_1
R117-R120 = Res: signal model: DEFAULT_RESISTOR_330.000000OHM_2_1
U1 = FOD060L
U2 U6 U13 U16 = ADA4898-2
U3 U5 U12 U15 = ADS1271
U4 U7 U14 U17 = THS4131IDGN
U8 = BAW56
U9 = W5300
U10 = STM32F407ZGT6
U11 = IS61WV51216BLL
U18 U26 U33 = MP1584
U19 = LT3080
U20 U27 U28 = LT1763
U21 = LT1964-5
U22 = LT3580
U23 U25 U29 U31 = LM334SM
U24 = REF3125
U30 = OPA350UA
U32 U34 = LT1963

## Footprints (pads in the part's own frame, mm; a bottom-side part is the same pattern mirrored in y, then rotated)
1N457-DIP
  round 0.9 hole 0.6: 1(0,0) 2(5.08,0)
0603
  rect 0.54x0.9 smd: 1(-0.76,0) 2(0.76,0)
0805
  rect 0.75x1.4 smd: 1(-1.05,0) 2(1.05,0)
1008
  rect 0.95x2.2 smd: 1(-1.25,0) 2(1.25,0)
1206
  rect 1x1.75 smd: 1(-1.55,0) 2(1.55,0)
ADA4898-2-SOIC8
  rect 1.55x0.6 smd: 1(-2.7,1.905) 2(-2.7,0.635) 3(-2.7,-0.635) 4(-2.7,-1.905) 5(2.7,-1.905) 6(2.7,-0.635) 7(2.7,0.635) 8(2.7,1.905)
  rect 2.4x3.45 smd: 9(0,0)
ADS1271-SOP16
  rect 1.5x0.45 smd: 1(-2.9,2.275) 2(-2.9,1.625) 3(-2.9,0.975) 4(-2.9,0.325) 5(-2.9,-0.325) 6(-2.9,-0.975) 7(-2.9,-1.625) 8(-2.9,-2.275) 9(2.9,-2.275) 10(2.9,-1.625) 11(2.9,-0.975) 12(2.9,-0.325) 13(2.9,0.325) 14(2.9,0.975) 15(2.9,1.625) 16(2.9,2.275)
AO3407-SOT23
  rect 1x0.6 smd: 1(-1.15,0.95) 2(-1.15,-0.95) 3(1.15,0)
BAW56-SOT23
  rect 1x0.6 smd: 1(-1.15,0.95) 2(-1.15,-0.95) 3(1.15,0)
BNC
  round 2.4 hole 1.4: 1(0,0) 2(4.05,4.05) 3(4.05,-4.05) 4(-4.05,-4.05) 5(-4.05,4.05)
CAP-3528
  rect 1.8x2.3 smd: 1(-1.45,0) 2(1.45,0)
CAP-6032
  rect 2.3x2.3 smd: 1(-2.45,0) 2(2.45,0)
CAP-7343
  rect 2.3x2.5 smd: 1(-3.1,0) 2(3.1,0)
FOD060L-SOIC8
  rect 1.65x0.65 smd: 1(-2.65,1.905) 2(-2.65,0.635) 3(-2.65,-0.635) 4(-2.65,-1.905) 5(2.65,-1.905) 6(2.65,-0.635) 7(2.65,0.635) 8(2.65,1.905)
GX12-3P
  round 2.5 hole 1.7: 1(0,2.194) 2(-1.9,-1.097) 3(1.9,-1.097)
H-10-2
  rect 1.6x1.6 hole 1.05: 1(0,0)
  round 1.6 hole 1.05: 2(0,2.54) 3(2.54,0) 4(2.54,2.54) 5(5.08,0) 6(5.08,2.54) 7(7.62,0) 8(7.62,2.54) 9(10.16,0) 10(10.16,2.54) 11(12.7,0) 12(12.7,2.54) 13(15.24,0) 14(15.24,2.54) 15(17.78,0) 16(17.78,2.54) 17(20.32,0) 18(20.32,2.54) 19(22.86,0) 20(22.86,2.54)
IS61WV51216BLL-TSOP44
  rect 1.3x0.55 smd: 1(-5.7,8.4) 2(-5.7,7.6) 3(-5.7,6.8) 4(-5.7,6) 5(-5.7,5.2) 6(-5.7,4.4) 7(-5.7,3.6) 8(-5.7,2.8) 9(-5.7,2) 10(-5.7,1.2) 11(-5.7,0.4) 12(-5.7,-0.4) 13(-5.7,-1.2) 14(-5.7,-2) 15(-5.7,-2.8) 16(-5.7,-3.6) 17(-5.7,-4.4) 18(-5.7,-5.2) 19(-5.7,-6) 20(-5.7,-6.8) 21(-5.7,-7.6) 22(-5.7,-8.4) 23(5.7,-8.4) 24(5.7,-7.6) 25(5.7,-6.8) 26(5.7,-6) 27(5.7,-5.2) 28(5.7,-4.4) 29(5.7,-3.6) 30(5.7,-2.8) 31(5.7,-2) 32(5.7,-1.2) 33(5.7,-0.4) 34(5.7,0.4) 35(5.7,1.2) 36(5.7,2) 37(5.7,2.8) 38(5.7,3.6) 39(5.7,4.4) 40(5.7,5.2) 41(5.7,6) 42(5.7,6.8) 43(5.7,7.6) 44(5.7,8.4)
KEY-HD11
  round 0.1 hole 0.85 unplated: (0.55,2.4) (3.55,2.4)
  rect 0.8x1.1 smd: 1(0,4.8) 2(0,0) 3(4.1,4.8) 4(4.1,0)
  rect 0.85x0.85 smd: 5(1.1,4.675) 6(1.1,0.125)
L-7-7-3
  rect 2x3.25 smd: 1(-3.1,0) 2(3.1,0)
LED-3
  rect 1.5x1.5 hole 0.9: 1(0,0) 3(0,2.54) 5(0,5.08)
  round 1.5 hole 0.9: 2(2.54,0) 4(2.54,2.54) 6(2.54,5.08)
LM334SM-SOP8
  rect 1.55x0.6 smd: 1(-2.7,1.905) 2(-2.7,0.635) 3(-2.7,-0.635) 4(-2.7,-1.905) 5(2.7,-1.905) 6(2.7,-0.635) 7(2.7,0.635) 8(2.7,1.905)
LT1763-SOP8
  rect 1.55x0.6 smd: 1(-2.7,1.905) 2(-2.7,0.635) 3(-2.7,-0.635) 4(-2.7,-1.905) 5(2.7,-1.905) 6(2.7,-0.635) 7(2.7,0.635) 8(2.7,1.905)
LT1963-SOP8
  rect 1.55x0.6 smd: 1(-2.7,1.905) 2(-2.7,0.635) 3(-2.7,-0.635) 4(-2.7,-1.905) 5(2.7,-1.905) 6(2.7,-0.635) 7(2.7,0.635) 8(2.7,1.905)
LT1964-5-SOT23
  oval 1.25x0.55 smd: 1(-1.2,0.95) 2(-1.2,0) 3(-1.2,-0.95) 4(1.2,-0.95) 5(1.2,0.95)
LT3080-SOP8
  oval 1.35x0.45 smd: 1(-2.2,0.975) 2(-2.2,0.325) 3(-2.2,-0.325) 4(-2.2,-0.975) 5(2.2,-0.975) 6(2.2,-0.325) 7(2.2,0.325) 8(2.2,0.975)
  rect 1.65x1.85 smd: 9(0,0)
LT3580-SOP8
  oval 1.35x0.45 smd: 1(-2.2,0.975) 2(-2.2,0.325) 3(-2.2,-0.325) 4(-2.2,-0.975) 5(2.2,-0.975) 6(2.2,-0.325) 7(2.2,0.325) 8(2.2,0.975)
  rect 1.65x1.85 smd: 9(0,0)
MOLEX-2
  round 0.1 hole 1 unplated: (-3,3.94) (3,3.94)
  rect 1.5x1.5 hole 1: 1(0,0)
  round 1.5 hole 1: 2(0,3)
MOLEX-2-2
  round 0.1 hole 1 unplated: (-6,3.94) (3,3.94)
  rect 1.5x1.5 hole 1: 1(0,0)
  round 1.5 hole 1: 2(0,3) 3(-3,0) 4(-3,3)
MP1584-SOIC8
  rect 1.95x0.6 smd: 1(-2.5,1.905) 2(-2.5,0.635) 3(-2.5,-0.635) 4(-2.5,-1.905) 5(2.5,-1.905) 6(2.5,-0.635) 7(2.5,0.635) 8(2.5,1.905)
  rect 2.55x3.45 smd: 9(0,0)
MTG
  round 6.4 hole 3.2: 1(0,0)
OPA350UA-SOP8
  rect 1.55x0.6 smd: 1(-2.7,1.905) 2(-2.7,0.635) 3(-2.7,-0.635) 4(-2.7,-1.905) 5(2.7,-1.905) 6(2.7,-0.635) 7(2.7,0.635) 8(2.7,1.905)
OSC-3225
  rect 1.1x1.4 smd: 1(-1,1.25) 2(-1,-1.25) 3(1,-1.25) 4(1,1.25)
REF3125-SOT23
  rect 1.05x0.6 smd: 1(-1.15,0.95) 2(-1.15,-0.95) 3(1.15,0)
RJ45
  round 0.1 hole 3.5 unplated: (6.04,9.91) (6.04,-1.15)
  rect 1.8x1.8 hole 1: 1(0,0)
  round 1.8 hole 1: 2(-2.54,1.27) 3(0,2.54) 4(-2.54,3.81) 5(0,5.08) 6(-2.54,6.35) 7(0,7.62) 8(-2.54,8.89)
  rrect 1.5x1.5 hole 1: 9(10.94,-2.175) 12(10.94,11.075)
  round 1.5 hole 1: 10(10.94,0.365) 11(10.94,8.535)
  round 1.8 hole 1.5: 13(3.09,-3.57) 14(3.09,12.43)
S9014-SOT23
  rect 1x0.6 smd: 1(-1.15,0.95) 2(-1.15,-0.95) 3(1.15,0)
SMA
  rect 1.6x1.6 smd: 1(0,0) 2(4.5,0)
SOD123
  rect 1.15x0.75 smd: 1(-1.75,0) 2(1.75,0)
STM32F407ZGT6-LQFP144
  rect 1.5x0.3 smd: 1(-10.7,8.75) 2(-10.7,8.25) 3(-10.7,7.75) 4(-10.7,7.25) 5(-10.7,6.75) 6(-10.7,6.25) 7(-10.7,5.75) 8(-10.7,5.25) 9(-10.7,4.75) 10(-10.7,4.25) 11(-10.7,3.75) 12(-10.7,3.25) 13(-10.7,2.75) 14(-10.7,2.25) 15(-10.7,1.75) 16(-10.7,1.25) 17(-10.7,0.75) 18(-10.7,0.25) 19(-10.7,-0.25) 20(-10.7,-0.75) 21(-10.7,-1.25) 22(-10.7,-1.75) 23(-10.7,-2.25) 24(-10.7,-2.75) 25(-10.7,-3.25) 26(-10.7,-3.75) 27(-10.7,-4.25) 28(-10.7,-4.75) 29(-10.7,-5.25) 30(-10.7,-5.75) 31(-10.7,-6.25) 32(-10.7,-6.75) 33(-10.7,-7.25) 34(-10.7,-7.75) 35(-10.7,-8.25) 36(-10.7,-8.75) 73(10.7,-8.75) 74(10.7,-8.25) 75(10.7,-7.75) 76(10.7,-7.25) 77(10.7,-6.75) 78(10.7,-6.25) 79(10.7,-5.75) 80(10.7,-5.25) 81(10.7,-4.75) 82(10.7,-4.25) 83(10.7,-3.75) 84(10.7,-3.25) 85(10.7,-2.75) 86(10.7,-2.25) 87(10.7,-1.75) 88(10.7,-1.25) 89(10.7,-0.75) 90(10.7,-0.25) 91(10.7,0.25) 92(10.7,0.75) 93(10.7,1.25) 94(10.7,1.75) 95(10.7,2.25) 96(10.7,2.75) 97(10.7,3.25) 98(10.7,3.75) 99(10.7,4.25) 100(10.7,4.75) 101(10.7,5.25) 102(10.7,5.75) 103(10.7,6.25) 104(10.7,6.75) 105(10.7,7.25) 106(10.7,7.75) 107(10.7,8.25) 108(10.7,8.75)
  rect 0.3x1.5 smd: 37(-8.75,-10.7) 38(-8.25,-10.7) 39(-7.75,-10.7) 40(-7.25,-10.7) 41(-6.75,-10.7) 42(-6.25,-10.7) 43(-5.75,-10.7) 44(-5.25,-10.7) 45(-4.75,-10.7) 46(-4.25,-10.7) 47(-3.75,-10.7) 48(-3.25,-10.7) 49(-2.75,-10.7) 50(-2.25,-10.7) 51(-1.75,-10.7) 52(-1.25,-10.7) 53(-0.75,-10.7) 54(-0.25,-10.7) 55(0.25,-10.7) 56(0.75,-10.7) 57(1.25,-10.7) 58(1.75,-10.7) 59(2.25,-10.7) 60(2.75,-10.7) 61(3.25,-10.7) 62(3.75,-10.7) 63(4.25,-10.7) 64(4.75,-10.7) 65(5.25,-10.7) 66(5.75,-10.7) 67(6.25,-10.7) 68(6.75,-10.7) 69(7.25,-10.7) 70(7.75,-10.7) 71(8.25,-10.7) 72(8.75,-10.7) 109(8.75,10.7) 110(8.25,10.7) 111(7.75,10.7) 112(7.25,10.7) 113(6.75,10.7) 114(6.25,10.7) 115(5.75,10.7) 116(5.25,10.7) 117(4.75,10.7) 118(4.25,10.7) 119(3.75,10.7) 120(3.25,10.7) 121(2.75,10.7) 122(2.25,10.7) 123(1.75,10.7) 124(1.25,10.7) 125(0.75,10.7) 126(0.25,10.7) 127(-0.25,10.7) 128(-0.75,10.7) 129(-1.25,10.7) 130(-1.75,10.7) 131(-2.25,10.7) 132(-2.75,10.7) 133(-3.25,10.7) 134(-3.75,10.7) 135(-4.25,10.7) 136(-4.75,10.7) 137(-5.25,10.7) 138(-5.75,10.7) 139(-6.25,10.7) 140(-6.75,10.7) 141(-7.25,10.7) 142(-7.75,10.7) 143(-8.25,10.7) 144(-8.75,10.7)
THS4131IDGN-SOP8
  rect 1.45x0.45 smd: 1(-2.2,0.975) 2(-2.2,0.325) 3(-2.2,-0.325) 4(-2.2,-0.975) 5(2.2,-0.975) 6(2.2,-0.325) 7(2.2,0.325) 8(2.2,0.975)
  rect 1.55x1.85 smd: 9(0,0)
W5300-QFP100
  rect 1.5x0.3 smd: 1(-7.7,6) 2(-7.7,5.5) 3(-7.7,5) 4(-7.7,4.5) 5(-7.7,4) 6(-7.7,3.5) 7(-7.7,3) 8(-7.7,2.5) 9(-7.7,2) 10(-7.7,1.5) 11(-7.7,1) 12(-7.7,0.5) 13(-7.7,0) 14(-7.7,-0.5) 15(-7.7,-1) 16(-7.7,-1.5) 17(-7.7,-2) 18(-7.7,-2.5) 19(-7.7,-3) 20(-7.7,-3.5) 21(-7.7,-4) 22(-7.7,-4.5) 23(-7.7,-5) 24(-7.7,-5.5) 25(-7.7,-6) 51(7.7,-6) 52(7.7,-5.5) 53(7.7,-5) 54(7.7,-4.5) 55(7.7,-4) 56(7.7,-3.5) 57(7.7,-3) 58(7.7,-2.5) 59(7.7,-2) 60(7.7,-1.5) 61(7.7,-1) 62(7.7,-0.5) 63(7.7,0) 64(7.7,0.5) 65(7.7,1) 66(7.7,1.5) 67(7.7,2) 68(7.7,2.5) 69(7.7,3) 70(7.7,3.5) 71(7.7,4) 72(7.7,4.5) 73(7.7,5) 74(7.7,5.5) 75(7.7,6)
  rect 0.3x1.5 smd: 26(-6,-7.7) 27(-5.5,-7.7) 28(-5,-7.7) 29(-4.5,-7.7) 30(-4,-7.7) 31(-3.5,-7.7) 32(-3,-7.7) 33(-2.5,-7.7) 34(-2,-7.7) 35(-1.5,-7.7) 36(-1,-7.7) 37(-0.5,-7.7) 38(0,-7.7) 39(0.5,-7.7) 40(1,-7.7) 41(1.5,-7.7) 42(2,-7.7) 43(2.5,-7.7) 44(3,-7.7) 45(3.5,-7.7) 46(4,-7.7) 47(4.5,-7.7) 48(5,-7.7) 49(5.5,-7.7) 50(6,-7.7) 76(6,7.7) 77(5.5,7.7) 78(5,7.7) 79(4.5,7.7) 80(4,7.7) 81(3.5,7.7) 82(3,7.7) 83(2.5,7.7) 84(2,7.7) 85(1.5,7.7) 86(1,7.7) 87(0.5,7.7) 88(0,7.7) 89(-0.5,7.7) 90(-1,7.7) 91(-1.5,7.7) 92(-2,7.7) 93(-2.5,7.7) 94(-3,7.7) 95(-3.5,7.7) 96(-4,7.7) 97(-4.5,7.7) 98(-5,7.7) 99(-5.5,7.7) 100(-6,7.7)

## Nets
1V8: C54.2 C55.2 C60.2 C61.2 C66.2 C67.2 C68.2 L2.1 U9.11(VCC1V8_1) U9.13(1V8OUT) U9.36(VCC1V8_2) U9.58(VCC1V8_3) U9.72(VCC1V8_4) U9.92(VCC1V8_5) U9.94(VCC1V8_6)
1V8A: C56.2 C57.2 L2.2 U9.7(VCC1A8_1) U9.17(VCC1A8_2)
5.6V: C140.2 C145.2 C148.1 C149.2 C161.1 L3.2 L5.2 R86.1 U20.5(S\H\D\N\) U20.8(IN) U22.3(VIN) U22.5(S\H\D\N\)
GND: C1.1 C2.2 C3.2 C7.1 C8.1 C9.1 C10.1 C12.1 C13.1 C16.2 C17.2 C18.2 C19.2 C20.2 C21.1 C22.1 C23.1 C24.1 C25.2 C29.1 C31.1 C32.2 C33.2 C34.1 C36.2 C37.2 C38.1 C39.1 C40.1 C41.1 C42.2 C44.1 C45.1 C46.2 C47.1 C48.1 C49.2 C50.1 C51.1 C52.1 C53.1 C54.1 C55.1 C56.1 C57.1 C58.1 C59.1 C60.1 C61.1 C63.1 C64.1 C65.1 C66.1 C67.1 C68.1 C69.2 C70.2 C71.1 C72.1 C73.1 C74.1 C75.2 C76.2 C77.1 C78.1 C79.1 C80.2 C81.1 C82.1 C83.1 C84.1 C85.1 C86.1 C87.1 C88.1 C89.1 C90.1 C91.1 C92.1 C93.1 C94.2 C98.1 C100.1 C101.2 C102.2 C103.1 C105.2 C106.2 C107.1 C108.1 C109.1 C110.1 C111.2 C113.1 C114.1 C115.2 C116.1 C117.2 C121.1 C123.1 C124.2 C125.2 C126.1 C128.2 C129.2 C130.1 C131.1 C132.1 C133.1 C134.2 C136.1 C137.1 C138.2 C139.1 C140.1 C142.2 C143.2 C145.1 C146.2 C148.2 C149.1 C151.2 C152.2 C153.1 C154.2 C155.2 C156.1 C158.2 C159.1 C160.1 C161.2 C163.1 C164.1 C165.1 C166.1 C167.1 C169.1 C170.1 C172.2 C173.2 C174.2 C176.2 C177.1 C178.1 C179.2 C180.1 C181.1 C183.2 C184.2 C186.1 C187.1 C188.1 C189.2 C190.2 C191.2 C192.2 C193.1 C194.1 C196.2 C198.2 C199.1 C200.2 C201.2 C202.2 C203.2 C204.1 C205.1 D2.2 D4.2 D6.2 D8.2 D9.2 D10.1 D11.2 D12.2 D18.2(ANODE) J1.1 J2.2(SHIELD1) J2.3(SHIELD2) J2.4(SHIELD3) J2.5(SHIELD4) J3.2(SHIELD1) J3.3(SHIELD2) J3.4(SHIELD3) J3.5(SHIELD4) J4.8(GND) J4.13(SHIELD1) J4.14(SHIELD2) J5.2(SHIELD1) J5.3(SHIELD2) J5.4(SHIELD3) J5.5(SHIELD4) J6.2(SHIELD1) J6.3(SHIELD2) J6.4(SHIELD3) J6.5(SHIELD4) J8.1 K1.3 K1.5 K1.6 M1.1 M2.1 M3.1 M4.1 O1.2(GND1) O1.4(GND2) O2.2(GND1) O2.4(GND2) P2.4(GND1) P2.6(GND2) P2.8(GND3) P2.10(GND4) P2.12(GND5) P2.14(GND6) P2.16(GND7) P2.18(GND8) P2.20(GND9) Q2.2(E) R15.2 R16.2 R23.2 R24.2 R36.2 R40.1 R41.1 R54.2 R58.1 R60.1 R61.2 R62.2 R73.2 R74.2 R85.2 R87.2 R88.1 R89.2 R90.1 R94.1 R99.2 R101.2 R102.1 R109.2 R111.2 R112.1 R122.1 R124.1 R125.1 R126.1 R127.1 R128.1 U1.5(GND) U3.3(AGND) U3.6(FORMAT) U3.14(DGND) U3.15(VREFN) U4.9(GND-PAD) U5.3(AGND) U5.6(FORMAT) U5.8(DIN) U5.14(DGND) U5.15(VREFN) U7.9(GND-PAD) U9.4(GNDA1) U9.10(GNDA2) U9.12(GND1) U9.15(GND2) U9.16(GNDA3) U9.27(GND3) U9.37(GND4) U9.47(GND5) U9.59(GND6) U9.64(GND7) U9.73(GND8) U9.84(GND9) U9.93(GND10) U9.97(GND11) U10.16(VSS1) U10.31(VSSA) U10.38(VSS2) U10.51(VSS3) U10.61(VSS4) U10.83(VSS5) U10.94(VSS6) U10.107(VSS7) U10.120(VSS8) U10.130(VSS9) U11.12(GND1) U11.34(GND2) U12.3(AGND) U12.6(FORMAT) U12.14(DGND) U12.15(VREFN) U14.9(GND-PAD) U15.3(AGND) U15.6(FORMAT) U15.8(DIN) U15.14(DGND) U15.15(VREFN) U17.9(GND-PAD) U18.5(GND) U18.9(GND-PAD) U20.3(GND1) U20.6(GND2) U20.7(GND3) U21.1(GND) U22.8(SYNC) U22.9(GND-PAD) U24.3(GND) U26.5(GND) U26.9(GND-PAD) U27.3(GND1) U27.6(GND2) U27.7(GND3) U28.3(GND1) U28.6(GND2) U28.7(GND3) U30.4(V-) U32.3(GND1) U32.6(GND2) U32.7(GND3) U33.5(GND) U33.9(GND-PAD) U34.3(GND1) U34.6(GND2) U34.7(GND3)
VBAT: C146.1 C174.1 C196.1 J1.3 J7.1 J7.2 Q1.3(D) R113.1 R114.1 U18.7(VIN) U26.7(VIN) U33.7(VIN)
VCC5: C2.1 C3.1 C21.2 C22.2 C25.1 C33.1 C40.2 C45.2 C94.1 C102.1 C109.2 C114.2 C117.1 C125.1 C132.2 C137.2 C141.1 C142.1 C143.1 C165.2 C188.2 D17.2(ANODE) U2.8(+VS) U4.3(VCC+) U6.8(+VS) U7.3(VCC+) U13.8(+VS) U14.3(VCC+) U16.8(+VS) U17.3(VCC+) U20.1(OUT) U20.2(SENSE/ADJ) U24.1(IN) U30.7(V+)
VCC5-ADC: C17.1 C18.1 C36.1 C42.1 C105.1 C111.1 C128.1 C134.1 C171.1 C172.1 C173.1 D19.2(ANODE) U3.4(AVDD) U5.4(AVDD) U12.4(AVDD) U15.4(AVDD) U27.1(OUT) U27.2(SENSE/ADJ)
VCC20: C151.1 C163.2 C164.2 C166.2 C167.2 C186.2 C187.2 C193.2 C194.2 D1.1 D3.1 D5.1 D7.1 D23.2(ANODE) U19.1(OUT1) U19.2(OUT2) U19.3(OUT3) U19.9(OUT-PAD) U23.3(V+) U25.3(V+) U29.3(V+) U31.3(V+)
VCC-5: C9.2 C10.2 C23.2 C24.2 C31.2 C39.2 C44.2 C47.2 C100.2 C108.2 C113.2 C116.2 C123.2 C131.2 C136.2 C139.2 C150.1 C153.2 C156.2 R123.1 U2.4(-VS) U2.9(-VS-PAD) U4.6(VCC-) U6.4(-VS) U6.9(-VS-PAD) U7.6(VCC-) U13.4(-VS) U13.9(-VS-PAD) U14.6(VCC-) U16.4(-VS) U16.9(-VS-PAD) U17.6(VCC-) U21.5(OUT)
VCCA: C52.2 C53.2 C70.1 J4.4(TCT) J4.5(RCT) L1.2 U9.2(VCC3A3)
VDD3.3: BEAD1.1 C1.2 C74.2 C75.1 C81.2 C82.2 C83.2 C84.2 C85.2 C86.2 C87.2 C88.2 C89.2 C90.2 C91.2 C92.2 C93.2 C191.1 C192.1 D21.2(ANODE) LED1.1 LED1.3 LED1.5 R9.2 R52.1 R53.2 R55.2 R56.2 R57.2 R59.1 U1.2(VF+) U1.8(VCC) U10.6(VBAT) U10.17(VDD1) U10.30(VDD2) U10.32(VREF+) U10.39(VDD3) U10.52(VDD4) U10.62(VDD5) U10.72(VDD6) U10.84(VDD7) U10.95(VDD8) U10.108(VDD9) U10.121(VDD10) U10.131(VDD11) U10.143(PDR_ON) U10.144(VDD12) U11.11(VDD1) U11.33(VDD2) U32.1(OUT) U32.2(SENSE/ADJ)
VDD3.3-ADC: C19.1 C20.1 C37.1 C46.1 C106.1 C115.1 C129.1 C138.1 C182.1 C183.1 C184.1 D20.2(ANODE) U3.13(DVDD) U5.13(DVDD) U12.13(DVDD) U15.13(DVDD) U28.1(OUT) U28.2(SENSE/ADJ)
VDD3.3-ETH: C50.2 C51.2 C58.2 C59.2 C63.2 C64.2 C65.2 C201.1 C202.1 D22.2(ANODE) L1.1 R44.2 R45.2 R121.2 U9.14(VCC3V3_1) U9.26(VCC3V3_2) U9.46(VCC3V3_3) U9.63(VCC3V3_4) U9.83(VCC3V3_5) U34.1(OUT) U34.2(SENSE/ADJ)
ACT_LED: J4.11(YEL-) U8.3(A)
ADDR0: U9.57(ADDR0) U10.10(PF0) U11.1(A0)
ADDR1: U9.56(ADDR1) U10.11(PF1) U11.2(A1)
ADDR2: U9.55(ADDR2) U10.12(PF2) U11.3(A2)
ADDR3: U9.54(ADDR3) U10.13(PF3) U11.4(A3)
ADDR4: U9.53(ADDR4) U10.14(PF4) U11.5(A4)
ADDR5: U9.52(ADDR5) U10.15(PF5) U11.18(A5)
ADDR6: U9.51(ADDR6) U10.50(PF12) U11.19(A6)
ADDR7: U9.50(ADDR7) U10.53(PF13) U11.20(A7)
ADDR8: U9.49(ADDR8) U10.54(PF14) U11.21(A8)
ADDR9: U9.48(ADDR9) U10.55(PF15) U11.22(A9)
ADDR10: U10.56(PG0) U11.23(A10)
ADDR11: U10.57(PG1) U11.24(A11)
ADDR12: U10.87(PG2) U11.25(A12)
ADDR13: U10.88(PG3) U11.26(A13)
ADDR14: U10.89(PG4) U11.27(A14)
ADDR15: U10.90(PG5) U11.42(A15)
ADDR16: U10.80(PD11) U11.43(A16)
ADDR17: U10.81(PD12) U11.44(A17)
ADDR18: U10.82(PD13) U11.28(A18)
AOUT_F1: C28.2 R32.2 U6.6(-IN2) U6.7(VOUT2)
AOUT_F2: C6.2 R17.2 U2.6(-IN2) U2.7(VOUT2)
AOUT_F5: C120.2 R82.2 U16.6(-IN2) U16.7(VOUT2)
AOUT_F6: C97.2 R70.2 U13.6(-IN2) U13.7(VOUT2)
AOUTN_F1: C30.1 R29.1 R30.1 U5.2(AINN)
AOUTN_F2: C11.1 R18.1 R21.1 U3.2(AINN)
AOUTN_F5: C122.1 R79.1 R80.1 U15.2(AINN)
AOUTN_F6: C99.1 R67.1 R68.1 U12.2(AINN)
AOUTP_F1: C30.2 R27.1 R31.1 U5.1(AINP)
AOUTP_F2: C11.2 R19.1 R22.1 U3.1(AINP)
AOUTP_F5: C122.2 R77.1 R81.1 U15.1(AINP)
AOUTP_F6: C99.2 R65.1 R69.1 U12.1(AINP)
BOOT0: R58.2 U10.138(BOOT0)
BOOT1: R60.2 U10.48(PB2/BOOT1)
CLK: R47.1 U3.12(CLK) U5.12(CLK) U12.12(CLK) U15.12(CLK)
DATA0: U9.45(DATA0) U10.85(PD14) U11.7(I/O0)
DATA1: U9.44(DATA1) U10.86(PD15) U11.8(I/O1)
DATA2: U9.43(DATA2) U10.114(PD0) U11.9(I/O2)
DATA3: U9.42(DATA3) U10.115(PD1) U11.10(I/O3)
DATA4: U9.41(DATA4) U10.58(PE7) U11.13(I/O4)
DATA5: U9.40(DATA5) U10.59(PE8) U11.14(I/O5)
DATA6: U9.39(DATA6) U10.60(PE9) U11.15(I/O6)
DATA7: U9.38(DATA7) U10.63(PE10) U11.16(I/O7)
DATA8: U9.35(DATA8) U10.64(PE11) U11.29(I/O8)
DATA9: U9.34(DATA9) U10.65(PE12) U11.30(I/O9)
DATA10: U9.33(DATA10) U10.66(PE13) U11.31(I/O10)
DATA11: U9.32(DATA11) U10.67(PE14) U11.32(I/O11)
DATA12: U9.31(DATA12) U10.68(PE15) U11.35(I/O12)
DATA13: U9.30(DATA13) U10.77(PD8) U11.36(I/O13)
DATA14: U9.29(DATA14) U10.78(PD9) U11.37(I/O14)
DATA15: U9.28(DATA15) U10.79(PD10) U11.38(I/O15)
DRDY_F1: U5.10(D\R\D\Y\/FSYNC)
DRDY_F5: U15.10(D\R\D\Y\/FSYNC)
JTCK: P2.9(TCK) R54.1 U10.109(PA14/JTCK)
JTDI: P2.5(TDI) R56.1 U10.110(PA15/JTDI)
JTDO: P2.13(TD0) R53.1 U10.133(PB3/JTDO)
JTMS: P2.7(TMS) R55.1 U10.105(PA13/JTMS)
JTRST: P2.3(TRST) R57.1 U10.134(PB4/JTRST)
KEY: C80.1 K1.4 R52.2 U10.1(PE2)
L_LINK: J4.10(GRN-) U9.90(LINKLED)
LB: U10.141(PE0) U11.39(L\B\)
MODE: R48.2 U3.5(MODE) U5.5(MODE) U12.5(MODE) U15.5(MODE)
N99831_F1: C38.2 R33.1 U6.3(+IN1)
N99831_F2: C7.2 R12.1 U2.3(+IN1)
N99831_F5: C130.2 R83.1 U16.3(+IN1)
N99831_F6: C107.2 R71.1 U13.3(+IN1)
N99836_F1: C27.1 R25.1 R33.2
N99836_F2: C4.1 R11.1 R12.2
N99836_F5: C119.1 R75.1 R83.2
N99836_F6: C96.1 R63.1 R71.2
N99973_F1: C27.2 R26.1 U6.1(VOUT1) U6.2(-IN1)
N99973_F2: C4.2 R14.1 U2.1(VOUT1) U2.2(-IN1)
N99973_F5: C119.2 R76.1 U16.1(VOUT1) U16.2(-IN1)
N99973_F6: C96.2 R64.1 U13.1(VOUT1) U13.2(-IN1)
N100067_F1: C28.1 R26.2 R34.1
N100067_F2: C6.1 R13.1 R14.2
N100067_F5: C120.1 R76.2 R84.1
N100067_F6: C97.1 R64.2 R72.1
N100071_F1: C41.2 R34.2 U6.5(+IN2)
N100071_F2: C8.2 R13.2 U2.5(+IN2)
N100071_F5: C133.2 R84.2 U16.5(+IN2)
N100071_F6: C110.2 R72.2 U13.5(+IN2)
N101702_F1: C35.2 R24.1 R25.2
N101702_F2: C5.2 R11.2 R15.1
N101702_F5: C127.2 R74.1 R75.2
N101702_F6: C104.2 R62.1 R63.2
N105142_F1: C26.2 R23.1 R29.2 U7.1(VIN-)
N105142_F2: C14.2 R16.1 R18.2 U4.1(VIN-)
N105142_F5: C118.2 R73.1 R79.2 U17.1(VIN-)
N105142_F6: C95.2 R61.1 R67.2 U14.1(VIN-)
N105162_F1: C26.1 R30.2 U7.4(VOUT+)
N105162_F2: C14.1 R21.2 U4.4(VOUT+)
N105162_F5: C118.1 R80.2 U17.4(VOUT+)
N105162_F6: C95.1 R68.2 U14.4(VOUT+)
N105338_F1: C43.2 R31.2 R32.1 U7.8(VIN+)
N105338_F2: C15.2 R17.1 R19.2 U4.8(VIN+)
N105338_F5: C135.2 R81.2 R82.1 U17.8(VIN+)
N105338_F6: C112.2 R69.2 R70.1 U14.8(VIN+)
N105386_F1: C43.1 R27.2 U7.5(VOUT-)
N105386_F2: C15.1 R22.2 U4.5(VOUT-)
N105386_F5: C135.1 R77.2 U17.5(VOUT-)
N105386_F6: C112.1 R65.2 U14.5(VOUT-)
NE3: U10.125(PG10) U11.6(C\E\)
OSC_IN: C76.1 O2.1(X1) R51.2 U10.23(OSC_IN)
OSC_OUT: C77.2 O2.3(X2) R51.1 U10.24(OSC_OUT)
RESET: P2.15(R\E\S\E\T\) R59.2 U10.25(NRST)
RXIN: J4.6(RD-) R42.1 U9.6(RXIN)
RXIP: J4.3(RD+) R43.1 U9.5(RXIP)
SYNC: R50.2 U3.7(S\Y\N\C\/P\D\W\N\) U5.7(S\Y\N\C\/P\D\W\N\) U12.7(S\Y\N\C\/P\D\W\N\) U15.7(S\Y\N\C\/P\D\W\N\)
TXON: J4.2(TD-) R38.2 U9.9(TXON)
TXOP: J4.1(TD+) R39.2 U9.8(TXOP)
UB: U10.142(PE1) U11.40(U\B\)
VCAP_1: C78.2 U10.71(VCAP_1)
VCAP_2: C79.2 U10.106(VCAP_2)
VREF: C12.2 C13.2 C16.1 C29.2 C32.1 C34.2 C98.2 C101.1 C103.2 C121.2 C124.1 C126.2 R105.1 R107.1 U3.16(VREFP) U4.2(VOCM) U5.16(VREFP) U7.2(VOCM) U12.16(VREFP) U14.2(VOCM) U15.16(VREFP) U17.2(VOCM)
X1: C48.2 O1.1(X1) R35.1 U9.96(X1)
X2: C49.1 O1.3(X2) R35.2 U9.95(X2)
N02329: R97.2 R117.2 U23.2(R)
N02335: D13.2 R97.1 U23.1(V-)
N02340: R98.2 R118.2 U25.2(R)
N02346: D14.2 R98.1 U25.1(V-)
N02351: R106.2 R119.2 U29.2(R)
N02355: D15.2 R106.1 U29.1(V-)
N02366: D16.2 R108.1 U31.1(V-)
N02371: R108.2 R120.2 U31.2(R)
N09919: C141.2 U20.4(BYP)
N11014: C154.1 C155.1 C158.1 C162.1 L4.2 R95.1 U21.2(IN) U21.4(S\H\D\N\)
N14732: C150.2 U21.3(BYP)
N21405: C169.2 C170.2 C176.1 C177.2 C180.2 C181.2 L6.2 R100.1 U27.5(S\H\D\N\) U27.8(IN) U28.5(S\H\D\N\) U28.8(IN)
N21501: C171.2 U27.4(BYP)
N22091: C182.2 U28.4(BYP)
N25711: C189.1 C190.1 C198.1 C199.2 C200.1 C203.1 L7.2 R110.1 U32.5(S\H\D\N\) U32.8(IN) U34.5(S\H\D\N\) U34.8(IN)
N66345: BEAD1.2 C72.2 C73.2 U10.33(VDDA)
N84190: C178.2 C179.1 R103.1 R104.2
N86139: R104.1 U24.2(OUT)
N86146: R103.2 U30.3(+IN)
N86153: C185.2 R105.2 U30.2(-IN)
N86184: C185.1 R107.2 U30.6(OUTPUT)
N128197: LED1.2 R91.1
N128201: LED1.4 R92.1
N128205: LED1.6 R93.1
N135939: R10.2 U1.3(VF-)
N136019: J1.2 R10.1
N140989: U8.2(K2) U9.88(MII_TXD3)
N141270: J4.9(GRN+) R44.1
N141281: J4.12(YEL+) R45.1
N141324: U8.1(K1) U9.89(MII_TXEN)
N141537: C71.2 R42.2 R43.2
N142046: C69.1 R38.1 R39.1
N145831: R36.1 R37.1
N145835: R37.2 U9.1(REST_BG)
N155515: R40.2 U9.18(BIT16EN)
N158706: R41.2 U9.19(TEST_M3) U9.20(TEST_M2) U9.21(TEST_M1) U9.22(TEST_M0) U9.23(OP_M0) U9.24(OP_M1) U9.25(OP_M2)
N175561: R46.2 U10.41(PA5)
N175603: R49.1 U10.74(PB13)
N175698: R47.2 U10.43(PA7)
N175745: R50.1 U10.76(PB15)
N175907: R91.2 U10.2(PE3)
N175911: C35.1 D3.2 D4.1 D16.1 J3.1(CENTER) R120.1
N175923: C5.1 D1.2 D2.1 D15.1 J2.1(CENTER) R119.1
N175935: C127.1 D7.2 D8.1 D14.1 J6.1(CENTER) R118.1
N175947: C104.1 D5.2 D6.1 D13.1 J5.1(CENTER) R117.1
N175989: R92.2 U10.3(PE4)
N176012: R93.2 U10.4(PE5)
N178000: U9.60(W\R\) U10.119(PD5) U11.17(W\E\)
N178004: U9.62(C\S\) U10.124(PG9)
N178020: R121.1 U9.66(R\S\T\) U10.117(PD3)
N178024: U9.61(R\D\) U10.118(PD4) U11.41(O\E\)
N178917: R48.1 U10.70(PB11)
N182770: R9.1 U1.6(VO) U10.46(PB0)
N183039: C147.1 D9.1 L3.1 U18.1(SW)
N183079: C147.2 U18.8(BST)
N183155: C144.2 U18.3(COMP)
N183159: C144.1 R88.2
N183167: R85.1 R86.2 U18.4(FB)
N183271: R87.1 U18.6(FREQ)
N185244: C160.2 U22.7(SS)
N185264: C157.2 L5.1 U22.4(SW)
N185268: C157.1 D10.2 L4.1
N185294: C159.2 R96.1
N185298: R96.2 U22.2(VC)
N185302: C162.2 R95.2 U22.1(FB)
N189201: R1.2 U5.9(DOUT)
N189205: R1.1 U3.8(DIN)
N189451: R46.1 U3.11(SCLK) U5.11(SCLK)
N190056: C175.1 D11.1 L6.1 U26.1(SW)
N190112: C175.2 U26.8(BST)
N190188: C168.2 U26.3(COMP)
N190192: C168.1 R102.2
N190200: R99.1 R100.2 U26.4(FB)
N190298: R101.1 U26.6(FREQ)
N190693: R2.1 U12.8(DIN)
N190697: R2.2 U15.9(DOUT)
N190705: R49.2 U12.11(SCLK) U15.11(SCLK)
N191748: R6.1 U10.73(PB12)
N191869: R5.2 U3.10(D\R\D\Y\/FSYNC)
N191873: R7.2 U3.9(DOUT)
N191883: R5.1 U10.40(PA4)
N191890: R7.1 U10.42(PA6)
N191928: R6.2 U12.10(D\R\D\Y\/FSYNC)
N191932: R8.2 U12.9(DOUT)
N191963: R8.1 U10.75(PB14)
N192288: C197.1 D12.1 L7.1 U33.1(SW)
N192348: C197.2 U33.8(BST)
N192408: C195.2 U33.3(COMP)
N192428: C195.1 R112.2
N192436: R109.1 R110.2 U33.4(FB)
N192504: R111.1 U33.6(FREQ)
N194775: R94.2 U22.6(RT)
N203113: R116.2 U10.5(PE6)
N211423: C152.1 C204.2 Q1.2(S) R114.2 U19.5(VCTL) U19.7(IN2) U19.8(IN1)
N223576: J7.3 R89.1
N223793: J7.4 J8.2
N229005: Q2.3(C) R115.2
N229021: Q2.1(B) R116.1
N229185: Q1.1(G) R113.2 R115.1
N232895: C205.2 R90.2 U19.4(SET)
N262944: D17.1(CATHODE) R122.2
N266185: D18.1(CATHODE) R123.2
N266479: D19.1(CATHODE) R125.2
N266772: D20.1(CATHODE) R126.2
N267070: D21.1(CATHODE) R127.2
N267369: D22.1(CATHODE) R128.2
N269157: D23.1(CATHODE) R124.2

Pads without a net: J4 7; K1 1 2; P2 1 2 11 17 19; U1 1 4 7; U4 7; U7 7; U9 3 65 67 68 69 70 71 74 75 76 77 78 79 80 81 82 85 86 87 91 98 99 100; U10 7 8 9 18 19 20 21 22 26 27 28 29 34 35 36 37 44 45 47 49 69 91 92 93 96 97 98 99 100 101 102 103 104 111 112 113 116 122 123 126 127 128 129 132 135 136 137 139 140; U14 7; U17 7; U18 2; U19 6; U23 4 5 6 7 8; U25 4 5 6 7 8; U26 2; U29 4 5 6 7 8; U30 1 5 8; U31 4 5 6 7 8; U32 4; U33 2; U34 4

## Via types
v1: diameter 0.406, hole 0.305, TOP to BOTTOM, 820 vias
v2: diameter 0.9, hole 0.45, TOP to BOTTOM, 7 vias

## Routing (per net, layer and track width the routed paths; a pad name or vN(x,y) marks a point on that pad's centre or on a via; arc(x,y) is an arc through that point)
1V8: length 43
  TOP w0.203: U9.11 v1(17.19,26.64) 17.68,26.64 18.19,26.13 U9.13 18.19,23 17.78,22.59 C61.2 ; v1(13.69,35.89) U9.72 13.69,41.27 13.72,41.29 C66.2 ; C68.2 26.97,31.5 26.87,31.59 U9.36 24.71,31.59 24.66,31.54 21.22,31.54 v1(20.83,31.93) ; v1(13.21,30.59) U9.92 9,30.59 8.38,29.97 C60.2 ; v1(20.6,36.15) 20.6,37.92 20.24,38.28 20.24,39.01 20.69,39.46 U9.58 20.69,41.27 20.83,41.41 C67.2 ; U9.94 v1(13.16,29.59)
  TOP w0.381: C54.2 v1(33.53,21.18) ; C55.2 31.56,19.56 v1(30.81,19.56) L2.1
1V8A: length 21.3
  TOP w0.203: 20.19,26.21 24.54,26.21 25.4,25.35 C57.2 25.58,21.91 C56.2 27.32,22.06 L2.2 ; 20.19,26.21 19.2,27.2 16.52,27.2 15.19,25.87 U9.7 ; 20.19,26.21 U9.17
5.6V: length 66.3
  TOP w0.381: 81.48,40.76 83.68,42.95 86.39,42.95 87.37,43.94 C148.1 87.37,45.47 87.13,45.72 C145.2 87.25,48.89 U20.5 87.25,51.73 87.59,52.07 90.72,52.07 91.06,51.73 U20.8 91.06,48.89 C140.2 ; 81.48,40.76 81.48,42.07 81.51,42.1 C149.2 ; 81.48,40.76 L3.2 81.48,37.14 82.42,36.2 v1(82.42,35.28) R86.1 ; U22.3 93.44,30.7 v1(93.47,30.73) 95.76,33.02 L5.2 ; v1(92.21,25.41) 92.79,24.82 U22.5 92.79,23.02 92.96,22.85 92.96,19.98 C161.1
  BOTTOM w0.381: v1(82.42,35.28) 82.42,33.81 85.5,30.73 v1(93.47,30.73) 93.47,28.55 92.21,27.29 v1(92.21,25.41)
GND: length 700.7
  TOP w0.203: R36.2 12.7,22.76 v1(13.69,23.75) ; U10.130 55.53,43.63 v1(56.06,43.1) ; v1(9.14,29.74) 9.49,30.09 U9.93 ; v1(33.78,51.31) 34.29,50.8 34.29,50.46 33.96,50.13 U10.38 ; v1(13.69,23.75) 13.97,23.47 C69.2 ; v1(13.69,23.75) U9.4 ; U10.51 34.2,43.63 v1(34.67,44.09) ; v1(23.47,32.38) 23.91,31.94 24.49,31.94 24.64,32.09 U9.37 ; v1(36.8,48.18) 37.58,48.96 U10.31 ; U10.16 45.08,53.91 v1(44.93,54.05) ; v1(55.88,38.23) 55.48,38.63 U10.120 ; v1(22.99,28.09) 22.99,27.48 23.38,27.09 U9.27 ; C86.1 C78.1 28.96,34.22 v1(27.59,35.59) ; U9.10 16.69,23.9 v1(17.25,23.35) 17.69,23.79 U9.12 ; C68.1 30.25,31.5 v1(29.86,31.1) ; C73.1 37.71,55.07 ; C73.1 37.24,55.72 ; C73.1 36.76,55.07 ; C73.1 37.24,54.41 ; C73.1 37.67,55.5 ; v1(39.5,33.35) 40.08,32.77 U10.83 ; v1(28.17,43.47) 28.46,43.18 C84.1 ; U9.73 13.19,41.44 v1(12.98,41.66) ; U9.15 19.19,23.91 19.31,23.79 19.69,23.79 ; U9.47 24.74,37.09 24.67,37.02 24.22,37.02 24.03,36.83 v1(22.94,36.83) ; C70.2 20.32,22.59 19.94,22.97 v1(19.94,23.55) 19.69,23.79 ; v1(18.08,43.64) 17.89,43.44 C75.2 ; C63.1 30.48,36.76 29.95,37.29 29.95,37.31 v1(29.64,37.62) 29.64,37.91 29.45,38.1 C85.1 28.96,38.84 29.46,39.34 31.58,39.34 32.3,38.63 U10.61 ; U9.84 9.14,34.59 v1(8.99,34.44) ; 45.1,29.72 45.58,30.2 U10.94 ; U10.107 v1(52.08,32.58) ; v1(17.37,41.5) 17.69,41.19 U9.64 ; U9.59 v1(20.19,42.2) ; 19.69,23.79 U9.16 ; v1(9.07,27.86) 9.3,28.09 U9.97
  TOP w0.381: D10.1 90.68,22.14 ; D10.1 90.68,20.59 ; D10.1 90.1,21.36 ; D10.1 91.16,21.84 v1(91.49,21.84) R94.1 ; D10.1 91.26,21.36 ; C184.2 83.28,60.59 ; C184.2 83.86,59.69 ; C184.2 82.7,59.69 ; C184.2 83.28,58.79 ; C184.2 v1(84.08,58.89) C183.2 ; C92.1 v1(58.42,49.45) ; C114.1 v1(74.3,74.17) C108.1 ; O1.2 5.69,26.16 ; O1.2 3.88,26.16 ; O1.2 v1(4.79,25.25) 4.79,24.85 C48.1 ; v1(95.28,56.77) 95.25,56.74 ; 95.25,56.74 95.25,56.64 C153.1 ; 95.25,56.74 C156.1 ; 96.77,21.19 C160.1 ; C160.1 97.25,21.84 ; C160.1 96.3,21.84 ; C160.1 96.77,22.66 96.77,22.66 v1(96.77,22.68) 96.75,22.7 96.75,22.89 C159.1 ; 89.19,48.77 C140.1 ; C140.1 89.66,48.11 ; C140.1 90.14,48.77 ; C140.1 v1(89.66,49.56) 89.66,50.51 U20.7 ; 88.52,56.04 v1(88.52,54.61) ; 88.52,56.04 88.02,56.04 ; 88.52,56.04 89.02,56.04 ; C98.1 v1(81.36,69.85) 81.43,69.92 C115.2 ; 93.73,48.11 C154.2 ; C154.2 94.2,48.77 ; C154.2 93.26,48.77 ; C154.2 v1(93.73,49.54) 93.73,49.54 C155.2 ; v1(28.02,49.23) 28.32,49.53 C81.1 ; v1(41.48,27.3) 41.33,27.3 40.69,26.67 C88.1 ; v1(92.74,50.6) 92.74,50.99 93.28,51.54 U21.1 ; 71.38,19.3 C174.2 ; C174.2 74.09,19.3 ; C174.2 73.15,19.72 v1(73.15,20.78) R101.2 ; C174.2 72.73,20.66 ; C174.2 72.73,17.95 ; C102.2 75.44,87.38 v1(75.44,88.19) C164.1 ; U5.14 23.72,69.3 23.42,69.59 23.42,69.95 ; 63.76,57.26 C191.2 ; C191.2 64.23,57.91 ; C191.2 v1(63.76,58.8) ; C191.2 63.28,57.91 ; C53.1 10.16,20.29 v1(10.74,19.71) ; R15.2 v1(32,87.63) ; C132.1 v1(56.49,72.39) C123.1 ; R128.1 v1(106.93,67.31) ; 67.44,50.64 67.44,50.16 66.91,49.64 66.88,49.64 C189.2 ; 67.44,50.64 67.94,50.64 ; 67.44,50.64 66.93,50.64 ; R109.2 v1(63.14,32) ; R109.2 64.01,31.53 ; R109.2 64.66,32 ; C42.2 v1(13.75,68.65) ; C74.1 16.38,62.74 v1(15.47,61.82) 15.47,61.01 16.09,60.39 U11.12 ; 77.34,56.04 77.85,56.04 ; 77.34,56.04 v1(77.34,54.53) ; 77.34,56.04 76.84,56.04 ; 96.27,22.71 C159.1 ; C159.1 96.74,23.37 ; C159.1 96.27,24.02 ; C159.1 95.79,23.37 ; C190.2 v1(63.25,49.93) ; C190.2 62.77,48.77 ; C190.2 63.72,48.77 ; C190.2 63.25,48.11 ; C57.1 v1(25.4,21.21) ; C79.1 v1(51.56,25.88) ; 23.42,69.95 v1(22.86,70.51) ; 23.42,69.95 U5.15 ; O2.4 43.73,56.62 ; O2.4 43.56,57.36 v1(43.81,57.36) C76.2 v1(44.6,56.85) C83.1 ; O2.4 42.82,57.38 ; O2.4 42.82,55.87 ; C143.2 v1(89.66,58.89) C142.2 ; C143.2 88.29,59.69 ; C143.2 89.44,59.69 ; C143.2 88.87,60.59 ; C143.2 88.87,58.79 ; C177.1 77.67,44.7 v1(77.2,45.17) 76.96,45.41 C176.2 ; C177.1 79.19,44.7 ; C177.1 78.49,45.78 ; C177.1 78.49,43.63 ; R102.1 74.68,35.02 ; R102.1 74.68,34.07 ; R102.1 74.02,34.54 ; R102.1 v1(75.69,34.54) 76.02,34.54 D11.2 ; C107.1 v1(67.61,83.31) ; U34.7 73.53,50.64 ; U34.7 72.52,50.64 ; U34.7 73.03,49.69 C200.2 ; J6.4 49.23,101.16 D8.2 ; C189.2 66.01,50.48 U32.6 ; C189.2 v1(66.01,47.26) ; 72.68,21.84 R101.2 ; R101.2 73.63,21.84 ; D18.2 v1(101.35,62.23) ; v1(55.78,67.11) 55.53,67.35 U15.6 ; J5.4 67.01,101.16 D6.2 ; R125.1 v1(106.93,66.04) ; 72.78,23.66 U26.5 ; U26.5 73.28,24.26 U26.9 ; U26.5 73.78,23.66 ; K1.5 v1(56.46,3.85) ; R74.2 v1(49.68,87.63) ; O1.4 3.19,28.16 ; O1.4 2.29,27.41 ; O1.4 v1(2.29,29.03) ; C41.1 v1(28.4,83.31) ; C38.1 v1(14.25,83.31) ; C93.1 v1(49.02,57.23) ; C201.2 70.33,57.91 ; C201.2 v1(69.85,58.8) ; C201.2 69.85,57.26 ; 43.95,56.34 C83.1 ; C83.1 44.6,55.86 ; C198.2 64.77,47.14 ; C198.2 64.29,46.48 ; C198.2 65.24,46.48 ; C198.2 64.77,45.44 v1(65.07,45.13) 65.5,44.7 C199.1 ; 82.43,56.04 U28.3 ; U28.3 v1(82.93,54.71) ; U28.3 83.43,56.04 ; C149.1 v1(85.34,44.7) C148.2 ; C149.1 83.9,44.7 ; C149.1 84.61,43.63 ; C149.1 84.61,45.78 ; 93.25,50.55 C155.2 ; C155.2 94.2,50.55 ; 82.43,50.64 U28.6 ; U28.6 82.93,51.62 ; U28.6 83.43,50.64 ; U28.6 83.06,50.51 v1(83.06,49.56) C181.1 ; U28.6 82.93,49.66 ; 39.42,58.62 O2.2 ; O2.2 41.23,58.62 ; O2.2 40.32,59.38 ; O2.2 40.32,57.87 ; O2.2 40.07,58.88 v1(39.32,58.88) C77.1 38.33,58.88 37.75,58.3 37.75,57.94 36.98,57.17 C72.1 ; v1(74.02,66.7) 73.37,67.35 U12.6 ; 77.69,58.79 C173.2 ; C173.2 v1(78.49,58.89) C172.2 ; C173.2 78.27,59.69 ; C173.2 77.11,59.69 ; 66.17,55.06 U32.3 ; U32.3 66.67,56.04 ; U32.3 65.66,56.04 ; U32.3 v1(66.17,57.15) 66.17,57.82 C192.2 ; C71.1 v1(24.13,21.16) ; C8.1 v1(46.15,83.31) ; C3.2 39.88,87.38 v1(39.88,88.14) C187.1 ; C166.1 v1(63.88,87.63) ; R94.1 92.2,22.5 ; R94.1 92.2,21.19 ; U27.7 78.49,50.51 v1(78.49,49.56) C169.1 ; U27.7 78.61,49.66 ; U27.7 79.12,50.64 ; U27.7 78.11,50.64 ; U27.7 78.61,51.62 ; C110.1 v1(81.66,83.31) ; C148.2 85.85,44.05 ; C148.2 85.85,45.36 ; C148.2 86.33,44.7 ; R88.1 v1(84.94,34.54) 85.16,34.54 D9.2 ; R88.1 83.82,35.02 ; R88.1 83.82,34.07 ; C49.2 3.27,29.97 ; C49.2 2.8,29.32 ; C49.2 v1(2.8,30.79) ; C49.2 2.32,29.97 ; R58.1 v1(58.42,46.76) ; 37.67,55.5 37.83,55.66 37.83,55.84 38.33,56.34 ; 77.34,50.64 77.34,51.62 ; 77.34,50.64 77.47,50.51 v1(77.47,49.56) C170.1 ; 77.34,50.64 77.34,49.66 ; 77.34,50.64 76.84,50.64 ; 77.34,50.64 77.85,50.64 ; C47.1 v1(20.93,72.39) C40.1 ; U5.6 v1(20.11,67.35) ; v1(73.66,69.62) 73.34,69.3 U12.3 ; R112.1 65.53,35.02 ; R112.1 64.88,34.54 ; R112.1 v1(66.52,34.54) 66.87,34.54 D12.2 ; R112.1 65.53,34.07 ; D12.2 67.82,36.49 ; D12.2 67.82,34.48 ; D12.2 66.81,35.49 ; 80.52,19.3 C146.2 ; C146.2 81.88,20.66 ; C146.2 83.23,19.3 ; C146.2 81.88,17.95 ; C146.2 82.3,19.72 82.3,20.83 ; C34.1 v1(29.49,71.88) ; C156.1 95.25,58.82 ; C156.1 94.67,57.91 ; C156.1 95.83,57.91 ; C66.1 13.89,44.96 v1(14.43,44.42) ; C25.2 v1(17.65,87.63) ; C158.2 95.54,45.47 ; C158.2 94.96,44.56 ; C158.2 94.96,46.37 ; C158.2 v1(93.75,45.47) ; 88.52,49.66 88.52,50.64 ; 88.52,50.64 88.02,50.64 ; 88.52,50.64 88.64,50.52 88.64,49.54 v1(88.65,49.54) C145.1 ; 88.52,50.64 89.02,50.64 ; U34.6 72.26,50.64 ; U34.6 71.75,49.11 C200.2 ; U34.6 71.25,50.64 ; U18.5 82.93,23.66 ; U18.5 82.42,24.26 U18.9 ; U18.5 81.92,23.66 ; D2.2 31.45,101.16 J2.4 ; 82.58,48.77 C181.1 ; C181.1 83.06,48.11 ; C181.1 83.53,48.77 ; C33.2 22.1,87.38 v1(22.1,88.14) C194.1 ; 36.4,56.85 C72.1 ; C72.1 36.98,55.94 ; C72.1 37.74,56.85 38.25,56.34 38.33,56.34 ; 84.2,49.66 84.2,50.64 ; 84.2,50.64 84.7,50.64 ; 84.2,50.64 84.2,51.62 ; 84.2,50.64 84.07,50.51 v1(84.07,49.53) C180.1 ; 84.2,50.64 83.7,50.64 ; C202.2 72.61,57.6 v1(72.22,57.21) 71.75,56.74 U34.3 ; U30.4 90.53,76.45 v1(90.14,76.07) ; R60.1 v1(28.02,45.21) ; C16.2 37.85,79 v1(37.85,79.73) C23.1 ; R122.1 v1(106.93,63.5) ; U11.34 v1(16.89,49.45) ; C7.1 v1(32.16,83.31) ; 78.01,48.77 C169.1 ; C169.1 78.96,48.77 ; C169.1 78.49,48.11 ; U12.15 v1(76.38,69.95) 77.03,69.3 U12.14 ; C60.1 5.81,29.97 ; C60.1 v1(5.33,30.78) ; C60.1 5.33,29.32 ; U3.14 41.5,69.3 41.2,69.59 41.2,69.95 ; C192.2 67.09,58.17 ; C192.2 66.51,57.26 ; C105.2 v1(70.36,66.9) ; 69.34,48.11 C203.2 ; C203.2 69.82,48.77 ; C203.2 69.34,49.46 69.62,49.73 v1(69.62,50.24) ; 66.32,43.63 C199.1 ; C199.1 67.02,44.7 ; C199.1 66.32,45.78 ; C121.1 62.99,69.85 C129.2 ; C121.1 v1(62.99,70.64) ; C121.1 63.68,69.85 63.75,69.92 C138.2 ; U5.3 v1(20.13,69.3) ; C61.1 17.78,19.99 18.08,19.68 v1(18.8,19.68) 19.05,19.94 C59.1 ; C94.2 v1(71.07,87.63) ; C103.1 v1(82.6,71.88) ; 81.82,21.84 R87.2 ; R87.2 82.3,20.83 ; R87.2 82.77,21.84 ; v1(31.75,69.59) 32.7,68.65 C17.2 ; C1.1 v1(93.47,67.36) ; C188.1 v1(83.62,72.39) ; v1(38.02,69.39) 37.93,69.3 U3.3 ; C152.2 v1(83.71,86.3) 83.57,86.45 R90.1 82.8,87.12 v1(82.29,87.63) C163.1 ; C13.1 v1(47.17,71.88) ; K1.3 v1(56.41,0.85) ; C131.1 v1(56.54,74.17) C137.1 ; v1(44.55,28.57) 44.55,29.17 45.1,29.72 ; U1.5 v1(85.14,70.87) ; v1(29.85,27.82) 30.48,27.18 C64.1 ; D4.2 13.67,101.16 J3.4 ; U32.6 66.67,50.64 ; U32.6 65.66,50.64 ; C205.1 v1(83.57,90.55) ; C179.2 91.57,79.25 91.19,79.63 v1(91.19,80.59) C178.1 ; C128.2 52.81,66.07 v1(53.26,66.07) 53.28,66.05 U15.8 ; C89.1 v1(52.83,25.88) ; 83.6,48.77 C180.1 ; C180.1 84.07,48.11 ; C180.1 84.55,48.77 ; C21.1 v1(38.73,72.39) C9.1 ; C2.2 v1(35.38,87.63) ; C124.2 55.63,78.99 v1(55.63,79.76) C136.1 ; 73.15,31.53 R99.2 ; R99.2 v1(72.13,32) ; R99.2 73.81,32 ; R111.2 v1(64.01,20.88) 64.01,19.72 C196.2 ; R111.2 64.48,21.84 ; R111.2 63.54,21.84 ; U5.8 v1(17.73,66.05) 17.27,66.05 C36.2 ; C51.1 3.56,22.1 v1(2.79,22.1) C50.1 ; C65.1 v1(4.14,35.05) ; C139.1 v1(60.02,80.26) ; C196.2 64.94,19.3 ; C196.2 63.59,20.66 ; C196.2 62.24,19.3 ; C196.2 63.59,17.95 ; C48.1 4.79,24.38 ; C48.1 4.32,23.73 ; C48.1 3.84,24.38 ; C48.1 4.32,25.04 ; C87.1 v1(45.97,25.83) ; C126.1 v1(64.8,71.88) ; C113.1 73.4,80.51 v1(73.4,79.73) C101.2 ; U22.9 94.74,25.27 U22.8 ; 82.3,20.83 v1(82.3,20.83) ; R126.1 v1(106.93,64.77) ; 76.96,34.48 D11.2 ; D11.2 75.96,35.49 ; D11.2 76.96,36.49 ; 88.17,48.77 C145.1 ; C145.1 89.12,48.77 ; C145.1 88.65,48.11 ; 41.2,69.95 v1(40.69,70.46) ; 41.2,69.95 U3.15 ; C151.2 v1(82.55,93.98) ; C176.2 77.43,46.48 ; C176.2 76.48,46.48 ; C176.2 76.96,47.14 ; 94.27,56.13 C153.1 ; C153.1 94.74,56.79 ; C153.1 94.74,55.48 ; C153.1 95.22,56.13 ; v1(81.41,68.96) 81.03,68.58 C106.2 ; U24.3 v1(82.31,81.21) ; U15.15 58.88,69.95 ; 58.88,69.95 v1(58.22,70.61) ; 58.88,69.95 58.88,69.7 59.28,69.3 U15.14 ; C116.1 v1(77.65,80.26) ; 86.11,34.48 D9.2 ; D9.2 85.1,35.49 ; D9.2 86.11,36.49 ; U15.3 55.32,69.3 55.8,69.79 v1(55.8,70.15) ; U21.1 93.28,52.71 ; U21.1 92.81,51.89 ; C161.2 97.19,20.66 ; C161.2 v1(98.81,19.3) ; C161.2 95.84,19.3 ; C161.2 97.19,17.95 ; R61.2 v1(67.44,77.97) ; 63.63,23.66 U33.5 ; U33.5 64.64,23.66 ; U33.5 64.14,24.26 U33.9 ; v1(38.43,66.24) 38.43,66.57 37.65,67.35 U3.6 ; C200.2 v1(72.1,47.13) ; C130.1 v1(49.81,83.31) ; C19.2 45.21,68.58 C12.1 45.9,69.85 v1(45.97,69.92) C20.2 ; R23.2 v1(14.28,77.97) ; 89.79,49.66 U20.7 ; U20.7 90.29,50.64 ; U20.7 89.29,50.64 ; C90.1 v1(58.42,38.18) ; C117.2 v1(53.24,87.63) ; C186.1 v1(46.13,87.63) ; C111.2 v1(68.58,69.8) ; C165.1 v1(83.79,78.23) ; U34.3 72.26,56.04 ; U34.3 71.25,56.04 ; U34.3 71.75,55.06 ; C45.1 v1(21.01,74.17) C39.1 ; C56.1 v1(27.18,20.6) ; C193.1 v1(28.32,87.63) ; C32.2 20.07,79 v1(20.07,79.71) C44.1 ; C46.2 v1(28.19,69.92) 28.12,69.85 C29.1 27.43,68.58 C37.2 ; R54.2 v1(46.99,22.89) ; R24.2 v1(14.25,87.63) ; R62.2 v1(67.51,87.63) ; C125.2 57.66,87.38 v1(57.66,88.21) C167.1 ; C91.1 v1(58.42,43.15) ; R16.2 v1(32.11,77.97) ; C170.1 77.94,48.77 ; C170.1 77.47,48.11 ; C170.1 77,48.77 ; C133.1 v1(63.93,83.31) ; C54.1 v1(32.77,22.1) 32,22.1 C55.1 ; Q2.2 89.1,90.3 v1(88.37,89.57) 88.37,88.67 C204.1 ; R127.1 v1(106.93,68.58) ; C18.2 v1(34.8,66.78) ; C31.1 v1(24.46,80.26) ; R89.2 v1(81.79,7.57) ; R124.1 v1(106.93,69.85) ; C82.1 38.33,56.34 ; C100.1 v1(74.3,72.39) C109.1 ; C58.1 v1(19.96,44.96) C67.1 ; C10.1 v1(38.68,74.17) C22.1 ; C24.1 v1(42.09,80.26) ; R73.2 v1(49.69,77.97) ; R85.2 v1(81.46,32) ; C134.2 v1(50.8,69.82) ; C52.1 v1(8.38,18.75) ; C80.2 v1(54.89,6.6) ; K1.6 v1(49.77,3.85)
  GND w0.381: 22.2,99.33 J3.3 ; J3.3 23.61,97.92 ; J3.3 23.61,100.73 ; J3.3 25.01,99.33 ; 59.17,106.02 J6.2 ; J6.2 60.57,107.43 ; J6.2 57.76,107.43 ; P2.6 53.07,14.73 ; P2.6 52.07,15.74 ; P2.6 51.07,14.73 ; P2.6 52.07,13.73 ; 76.95,97.92 J5.3 ; J5.3 78.35,99.33 ; J5.3 75.54,99.33 ; J5.3 76.95,100.73 ; 35.83,14.73 P2.18 ; P2.18 36.83,13.73 ; P2.18 36.83,15.74 ; P2.18 37.83,14.73 ; J4.14 25.89,12.24 ; J4.14 27,11.13 ; J4.14 24.79,11.13 ; J4.14 25.89,10.03 ; M2.1 5.08,106.78 ; M2.1 8.48,103.38 ; M2.1 1.68,103.38 ; M2.1 5.08,99.97 ; 45.99,14.73 P2.10 ; P2.10 46.99,15.74 ; P2.10 46.99,13.73 ; P2.10 47.99,14.73 ; J3.2 25.01,107.43 ; J3.2 23.61,106.02 ; J3.2 22.2,107.43 ; J4.8 23.46,16.76 ; J4.8 22.35,15.66 ; J4.8 21.25,16.76 ; J4.8 22.35,17.87 ; M1.1 105.16,8.48 ; M1.1 101.75,5.08 ; M1.1 105.16,1.68 ; M1.1 108.56,5.08 ; 34.29,13.73 P2.20 ; P2.20 35.29,14.73 ; P2.20 34.29,15.74 ; P2.20 33.29,14.73 ; 43.45,14.73 P2.12 ; P2.12 44.45,13.73 ; P2.12 44.45,15.74 ; P2.12 45.45,14.73 ; J4.13 11,11.13 ; J4.13 9.89,12.24 ; J4.13 8.79,11.13 ; J4.13 9.89,10.03 ; 31.88,99.33 J2.4 ; J2.4 34.69,99.33 ; J2.4 33.29,97.92 ; J2.4 33.29,100.73 ; J5.5 70.25,107.43 ; J5.5 68.85,106.02 ; J5.5 67.44,107.43 ; 89.22,102.36 J1.1 ; J1.1 92.13,102.36 ; J1.1 90.68,103.82 ; J1.1 90.68,100.91 ; P2.16 40.37,14.73 ; P2.16 39.37,13.73 ; P2.16 38.37,14.73 ; P2.16 39.37,15.74 ; 77.53,3.56 J8.1 ; J8.1 79.44,3.56 ; J8.1 78.49,2.6 ; J8.1 78.49,4.51 ; 31.88,107.43 J2.5 ; J2.5 34.69,107.43 ; J2.5 33.29,106.02 ; J6.3 59.17,100.73 ; J6.3 59.17,97.92 ; J6.3 57.76,99.33 ; J6.3 60.57,99.33 ; P2.4 54.61,15.74 ; P2.4 55.61,14.73 ; P2.4 54.61,13.73 ; P2.4 53.61,14.73 ; 67.44,99.33 J5.4 ; J5.4 68.85,100.73 ; J5.4 68.85,97.92 ; J5.4 70.25,99.33 ; J5.2 78.35,107.43 ; J5.2 76.95,106.02 ; J5.2 75.54,107.43 ; J3.5 16.91,107.43 ; J3.5 15.51,106.02 ; J3.5 14.1,107.43 ; J6.5 52.47,107.43 ; J6.5 51.07,106.02 ; J6.5 49.66,107.43 ; M4.1 5.08,8.48 ; M4.1 1.68,5.08 ; M4.1 5.08,1.68 ; M4.1 8.48,5.08 ; J2.2 42.79,107.43 ; J2.2 41.39,106.02 ; J2.2 39.98,107.43 ; J2.3 41.39,100.73 ; J2.3 39.98,99.33 ; J2.3 42.79,99.33 ; J2.3 41.39,97.92 ; P2.14 41.91,15.74 ; P2.14 42.91,14.73 ; P2.14 40.91,14.73 ; P2.14 41.91,13.73 ; J6.4 52.47,99.33 ; J6.4 51.07,100.73 ; J6.4 51.07,97.92 ; J6.4 49.66,99.33 ; 101.75,103.38 M3.1 ; M3.1 108.56,103.38 ; M3.1 105.16,106.78 ; M3.1 105.16,99.97 ; P2.8 49.53,15.74 ; P2.8 49.53,13.73 ; P2.8 50.53,14.73 ; P2.8 48.53,14.73 ; J3.4 16.91,99.33 ; J3.4 14.1,99.33 ; J3.4 15.51,97.92 ; J3.4 15.51,100.73
  BOTTOM w0.381: C71.1 v1(24.13,21.16) ; v1(45.97,69.92) 45.96,69.92 ; R40.1 v1(20.83,21.3)
  vias: v1(0.94,28.22) v1(0.94,26.29) v1(1.16,106.28) v1(1.16,101.2) v1(1.16,96.12) v1(1.16,91.04) v1(1.16,85.96) v1(1.16,80.88) v1(1.16,75.8) v1(1.16,70.72) v1(1.16,65.64) v1(1.16,60.56) v1(1.16,55.48) v1(1.16,50.4) v1(1.16,45.32) v1(1.16,40.24) v1(1.16,35.16) v1(1.16,19.92) v1(1.16,14.84) v1(1.16,9.76) v1(1.16,4.68) v1(1.3,24.36) v1(1.45,30.33) v1(3.61,23.47) v1(5.99,24.43) v1(6.73,26.01) v1(20.49,77.25) v1(20.49,76.74) v1(20.49,76.23) v1(20.49,75.73) v1(21,77.25) v1(21,76.74) v1(21,76.23) v1(21,75.73) v1(21.51,77.25) v1(21.51,76.74) v1(21.51,76.23) v1(21.51,75.73) v1(38.27,77.25) v1(38.27,76.74) v1(38.27,76.23) v1(38.27,75.73) v1(38.78,77.25) v1(38.78,76.74) v1(38.78,76.23) v1(38.78,75.73) v1(39.29,77.25) v1(39.29,76.74) v1(39.29,76.23) v1(39.29,75.73) v1(39.75,59.72) v1(40.97,59.72) v1(42.29,59.72) v1(43.1,55.5) v1(43.28,54.53) v1(43.64,59.72) v1(44.58,55.63) v1(56.05,77.25) v1(56.05,76.74) v1(56.05,76.23) v1(56.05,75.73) v1(56.56,77.25) v1(56.56,76.74) v1(56.56,76.23) v1(56.56,75.73) v1(57.07,77.25) v1(57.07,76.74) v1(57.07,76.23) v1(57.07,75.73) v1(62.74,54.36) v1(64.9,26.92) v1(64.9,26.16) v1(64.9,25.4) v1(65.66,26.92) v1(65.66,26.16) v1(65.66,25.4) v1(66.04,40.39) v1(66.04,17.27) v1(66.43,26.92) v1(66.43,26.16) v1(66.43,25.4) v1(66.8,53.59) v1(67.19,26.92) v1(67.19,26.16) v1(67.19,25.4) v1(70.61,45.47) v1(70.61,28.96) v1(71.12,34.8) v1(71.12,23.37) v1(72.64,53.59) v1(73.83,77.25) v1(73.83,76.74) v1(73.83,76.23) v1(73.83,75.73) v1(74.05,26.92) v1(74.05,26.16) v1(74.05,25.4) v1(74.34,77.25) v1(74.34,76.74) v1(74.34,76.23) v1(74.34,75.73) v1(74.85,77.25) v1(74.85,76.74) v1(74.85,76.23) v1(74.85,75.73) v1(74.81,26.92) v1(74.81,26.16) v1(74.81,25.4) v1(75.44,19.05) v1(75.57,26.92) v1(75.57,26.16) v1(75.57,25.4) v1(75.69,40.39) v1(76.33,26.92) v1(76.33,26.16) v1(76.33,25.4) v1(77.98,53.59) v1(79.5,28.96) v1(80.01,34.8) v1(80.26,46.74) v1(80.26,23.88) v1(81.53,17.02) v1(83.19,26.92) v1(83.19,26.16) v1(83.19,25.4) v1(83.95,26.92) v1(83.95,26.16) v1(83.95,25.4) v1(84.07,53.85) v1(84.58,40.39) v1(84.71,26.92) v1(84.71,26.16) v1(84.71,25.4) v1(85.48,26.92) v1(85.48,26.16) v1(85.48,25.4) v1(88.14,32.51) v1(88.9,53.59) v1(88.9,23.37) v1(89.66,17.27) v1(90.93,46.23) v1(93.26,26.75) v1(93.26,26.24) v1(93.26,25.73) v1(93.77,26.75) v1(93.77,26.24) v1(93.77,25.73) v1(94.23,40.64) v1(94.23,34.29) v1(94.28,26.75) v1(94.28,26.24) v1(94.28,25.73) v1(100.84,57.4) v1(101.09,52.32) v1(101.09,47.75) v1(101.09,42.42) v1(101.09,37.59) v1(101.09,31.5) v1(101.09,26.16) v1(101.09,21.59) v1(101.6,18.03) v1(109.39,106.61) v1(109.39,101.53) v1(109.39,96.45) v1(109.39,91.37) v1(109.39,86.29) v1(109.39,81.21) v1(109.39,76.13) v1(109.39,71.05) v1(109.39,65.97) v1(109.39,60.89) v1(109.39,55.81) v1(109.39,50.73) v1(109.39,45.65) v1(109.39,40.57) v1(109.39,35.49) v1(109.39,30.41) v1(109.39,25.33) v1(109.39,20.25) v1(109.39,15.17) v1(109.39,10.09) v1(109.39,5.01)
